# Altium PCB ISL6236_V01_PCB.PcbDoc
Units mm, origin at the board's own origin, x right, y up, seen from the top; angles counter-clockwise.
Board outline 50 x 50 mm, 6 copper layers (L1, L2, L3, L4, L5, L6), stack 0.535 mm thick; 41 components, 27 nets, 119 pads, 69 vias.
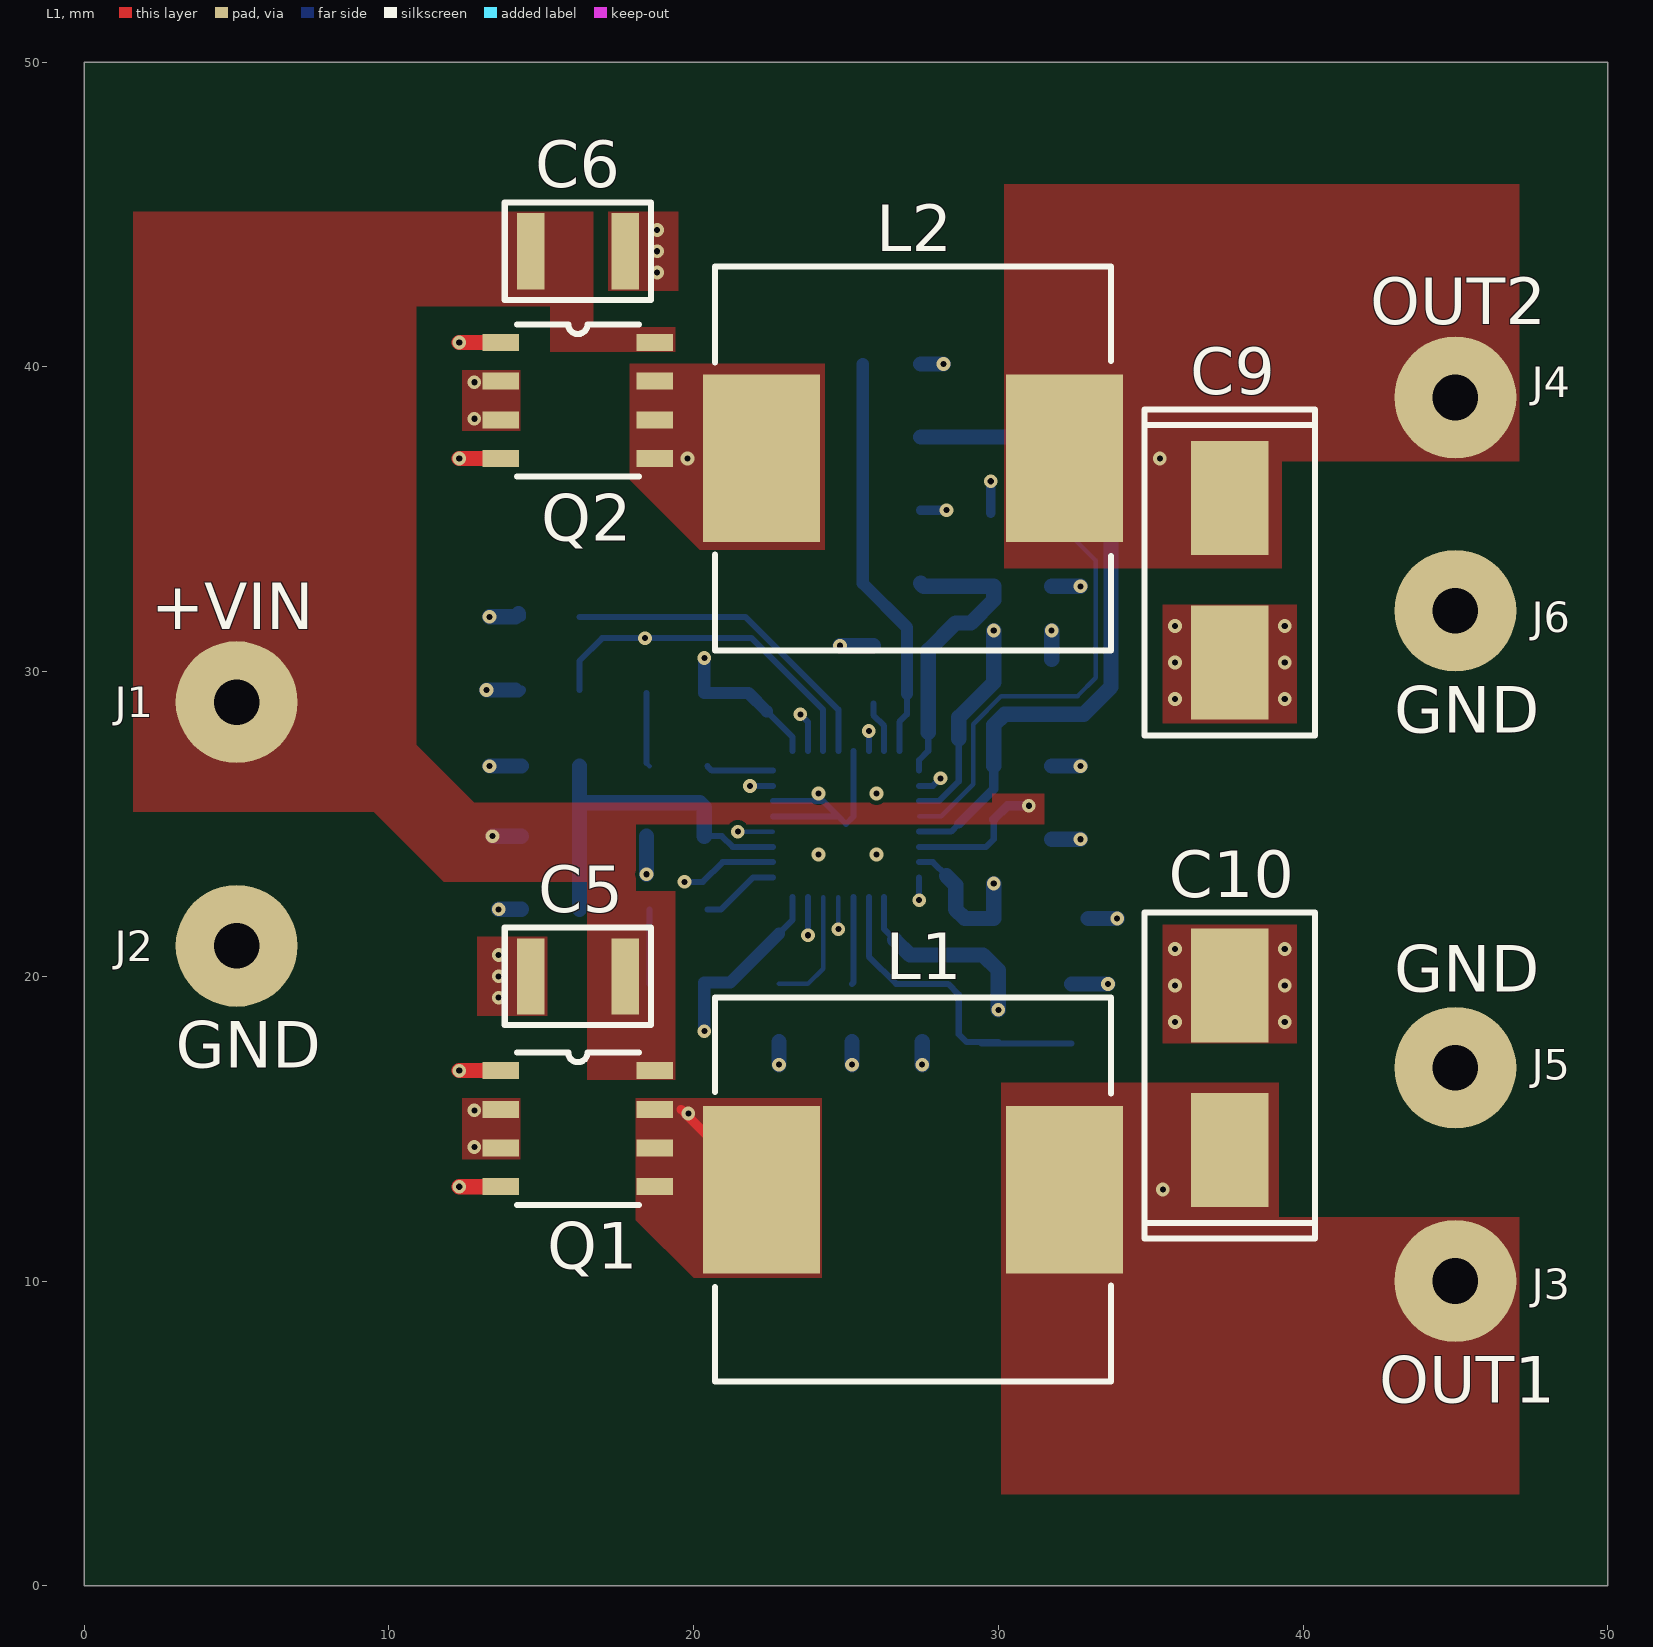
[diagram p0: L1 view]
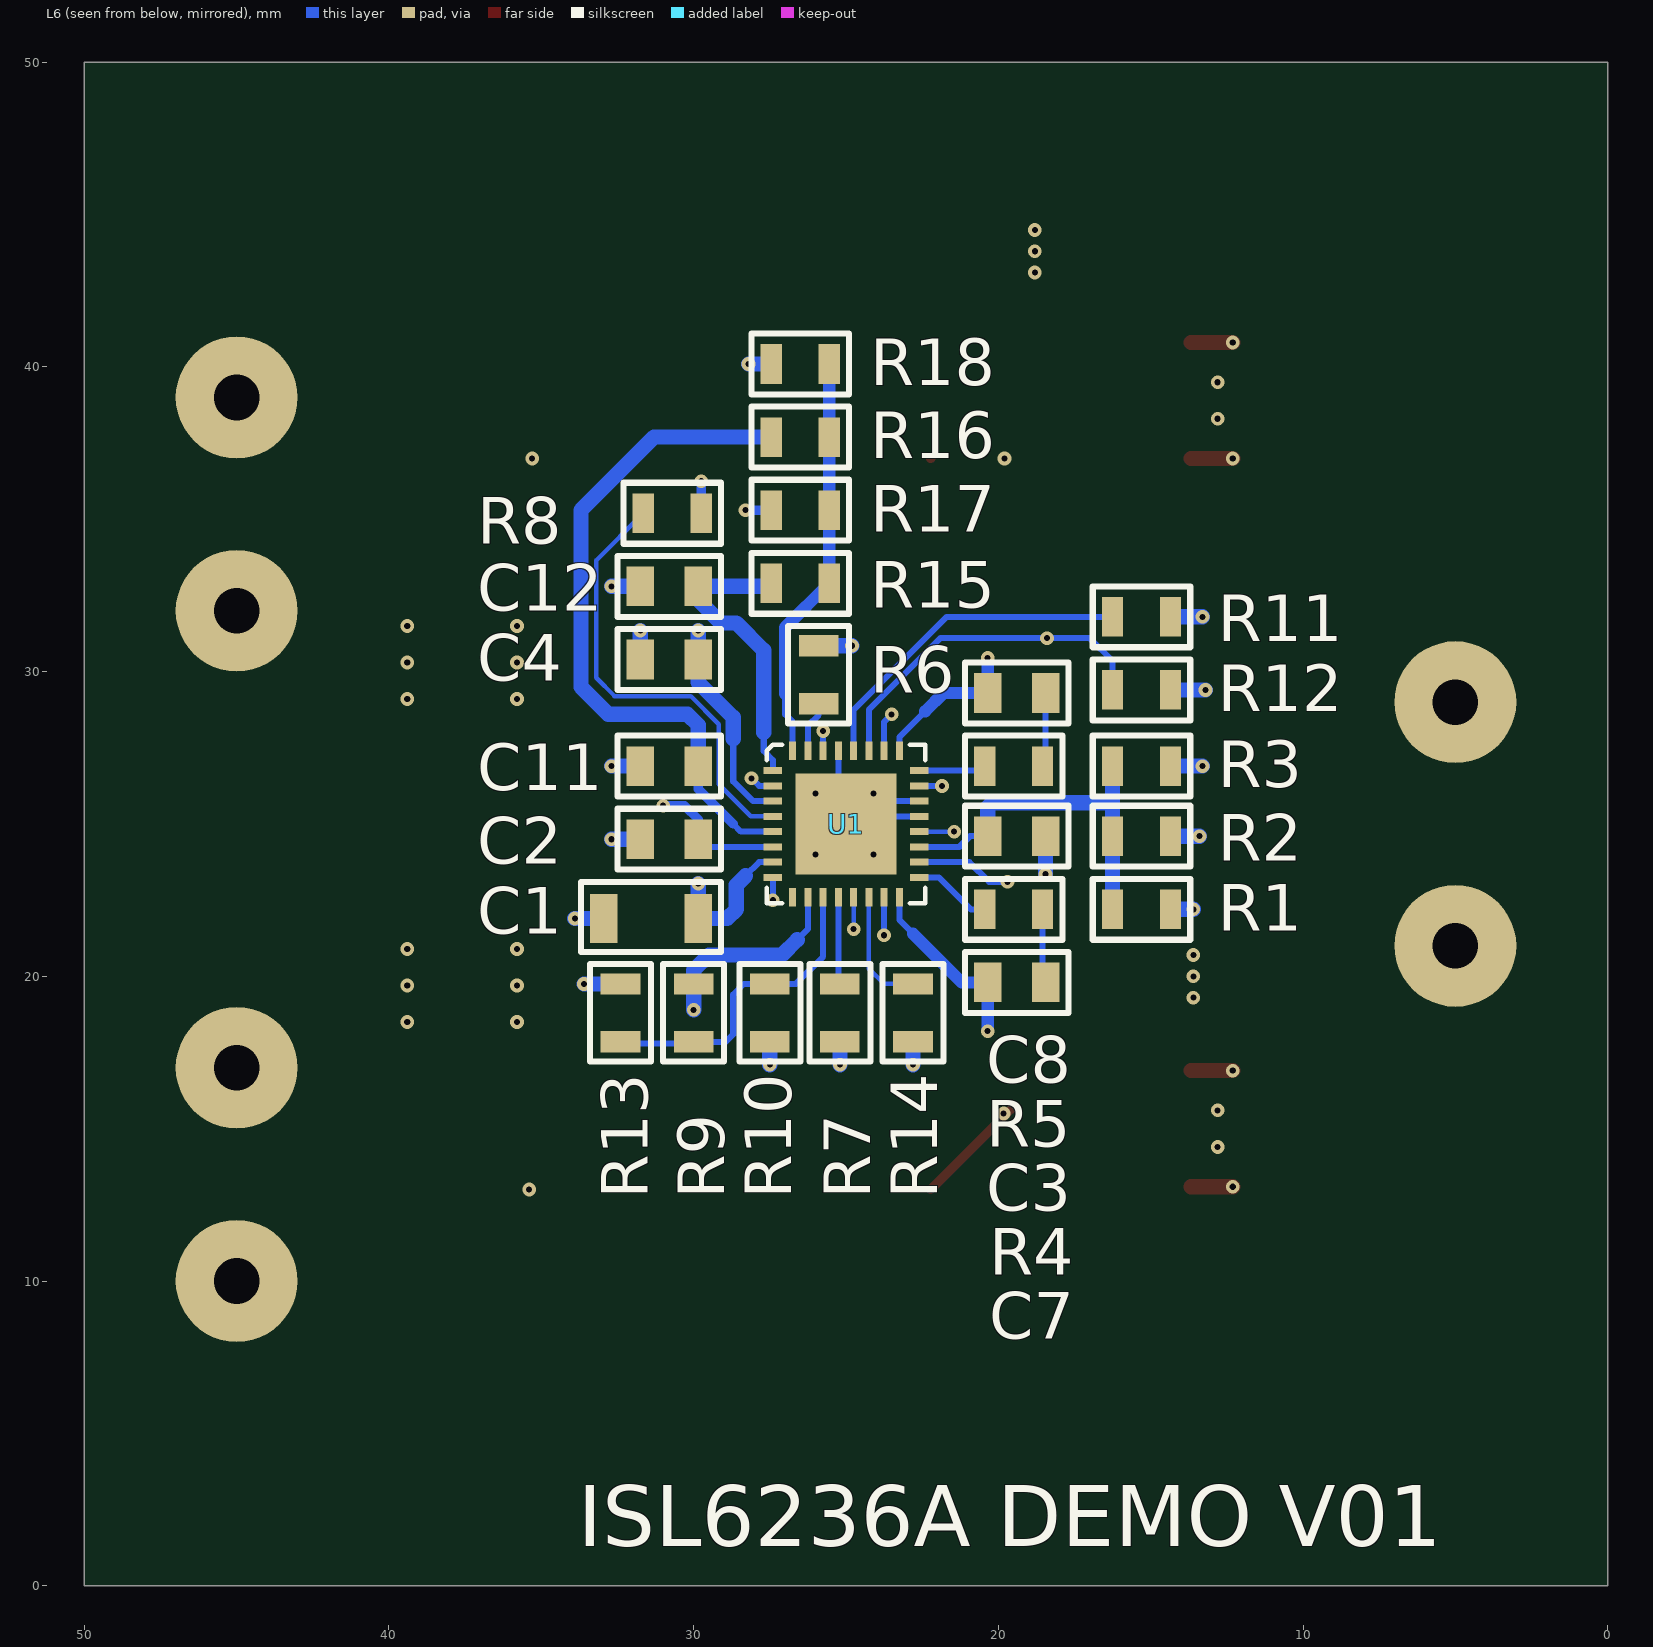
[diagram p1: L6 view, seen from below]
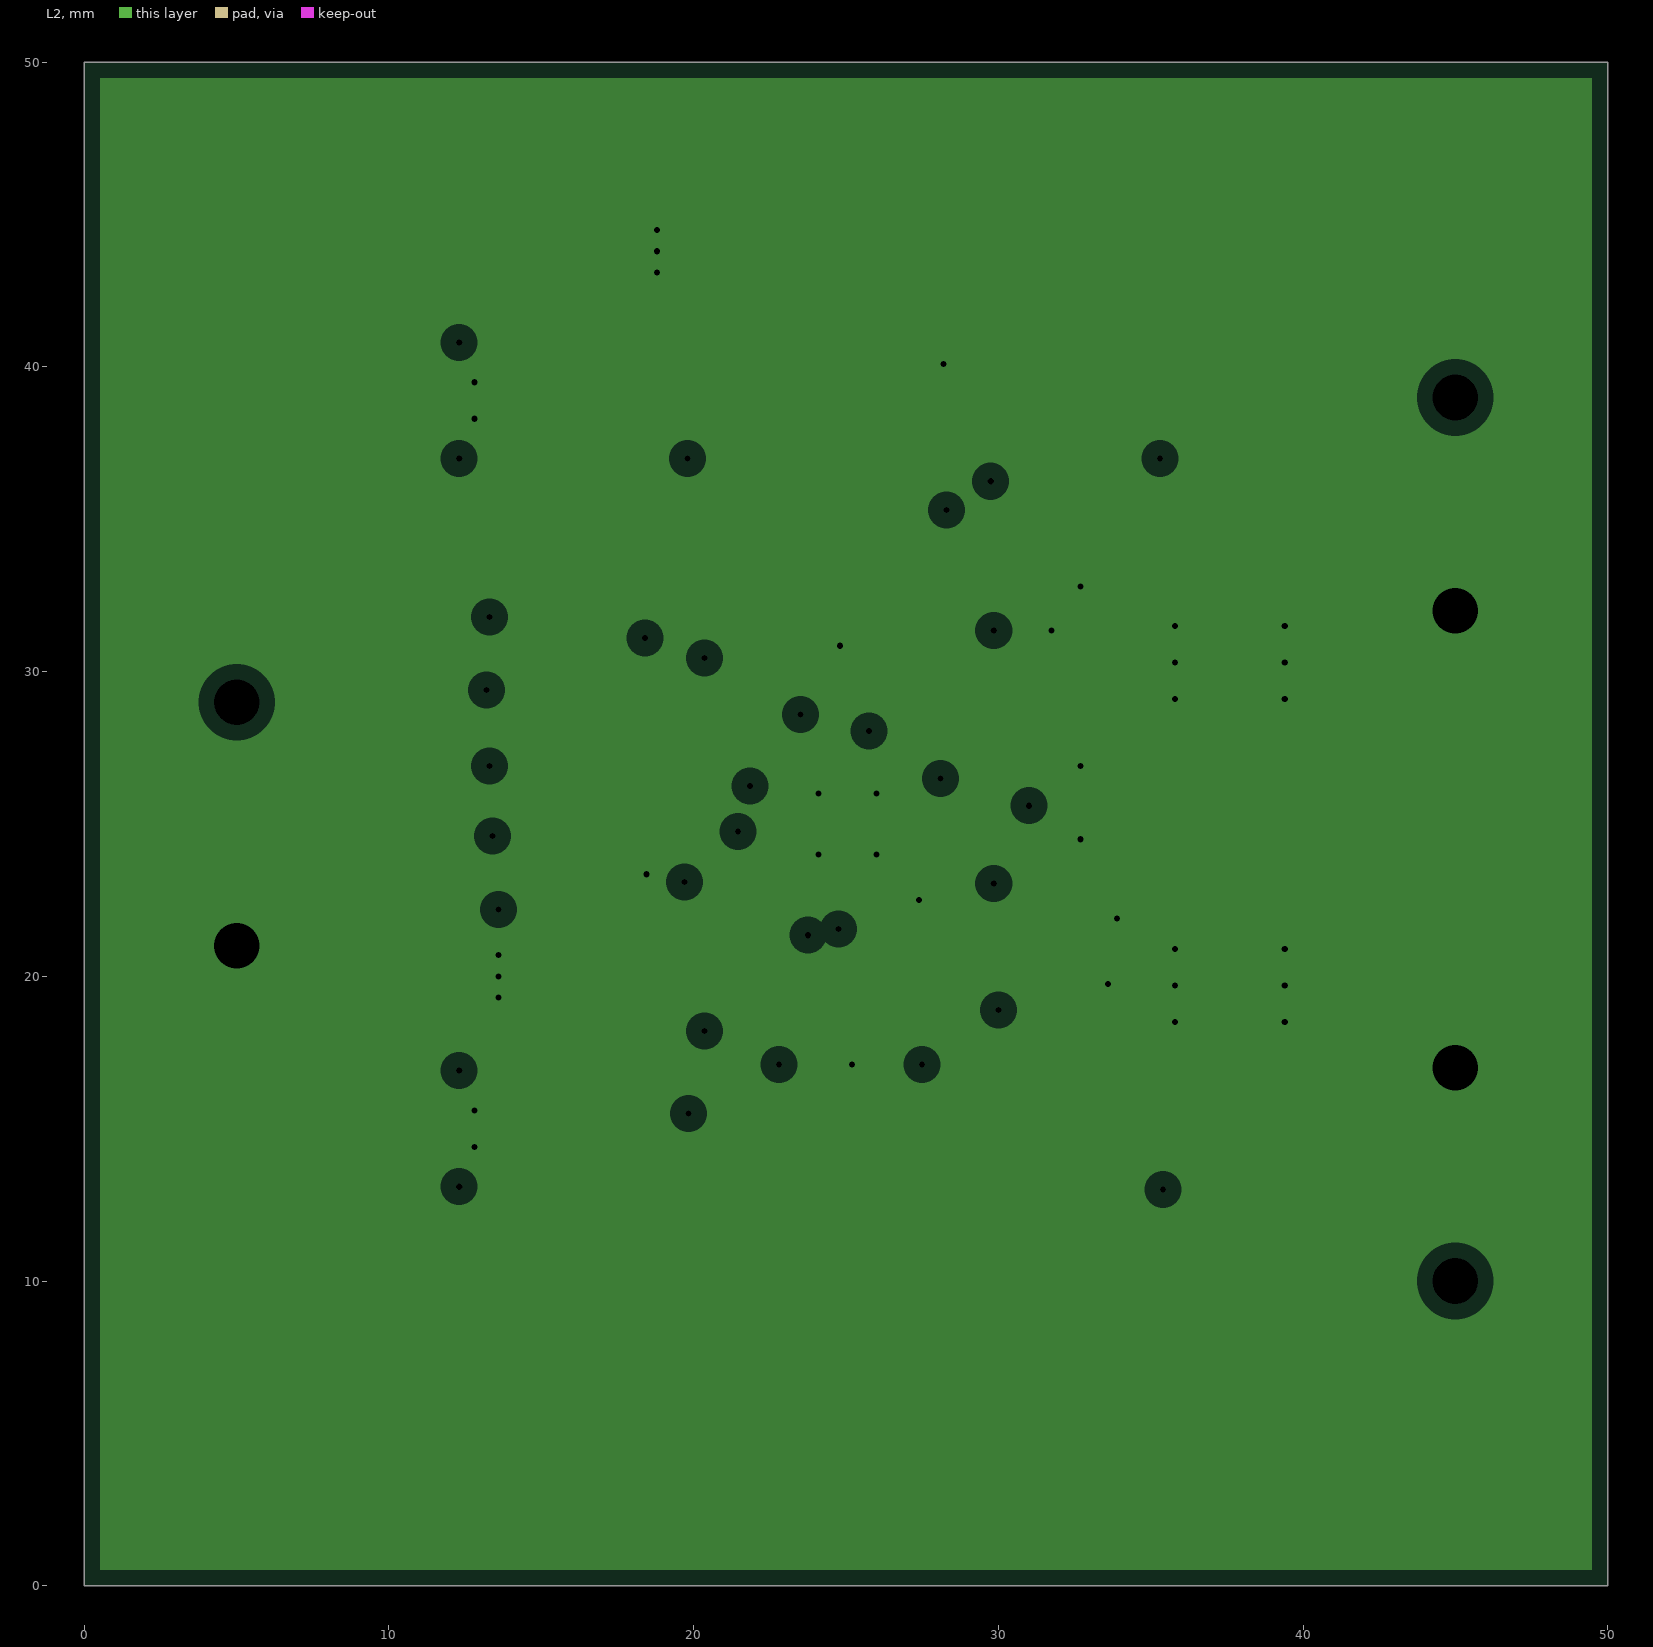
[diagram p2: L2, clearances drawn from the general rule]
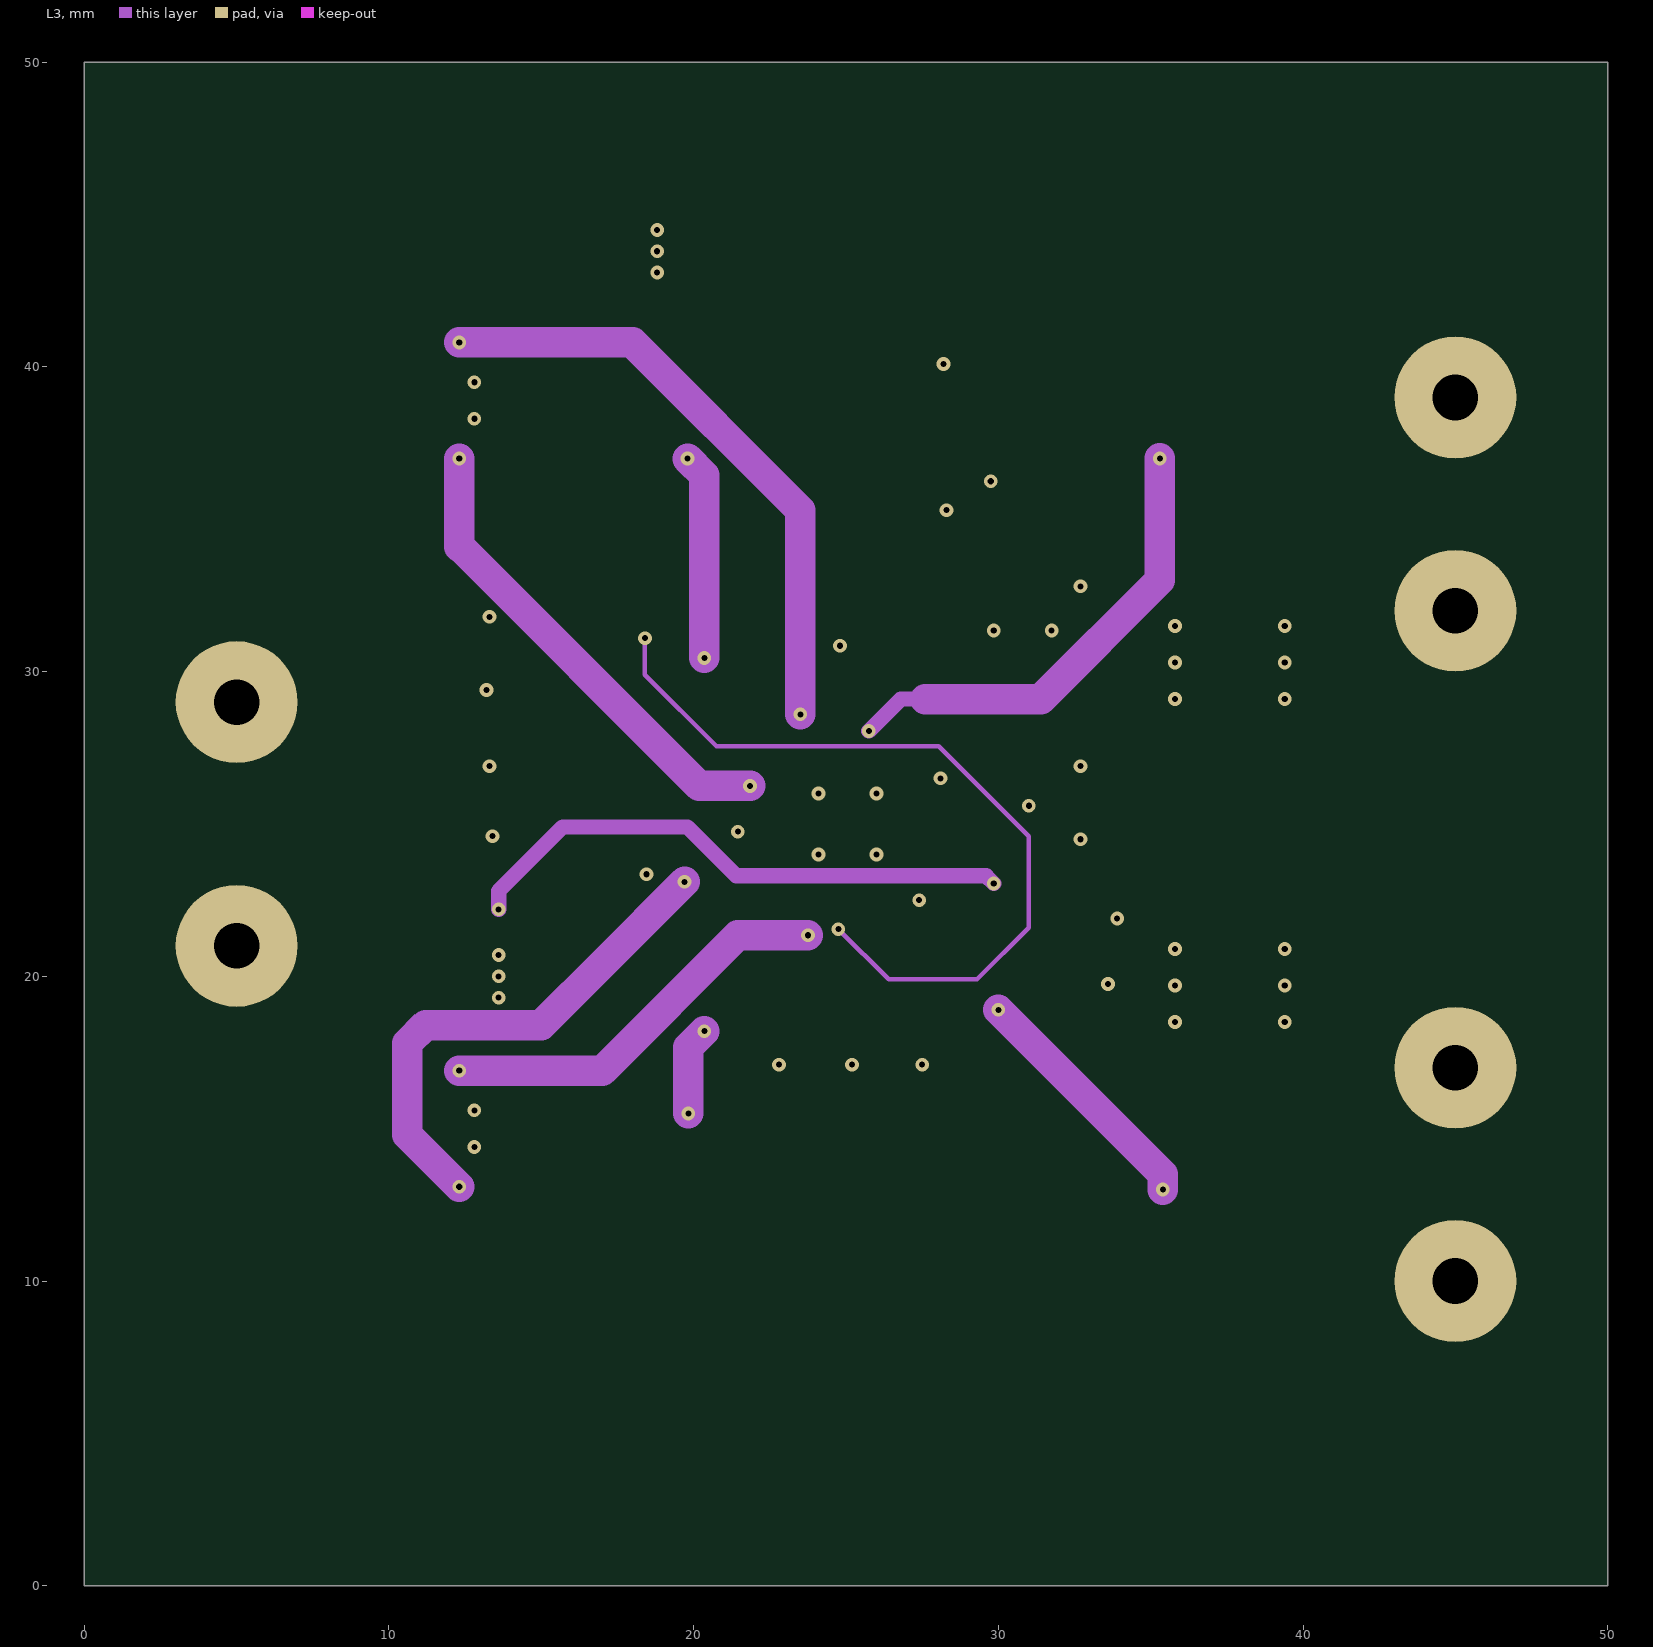
[diagram p3: L3]
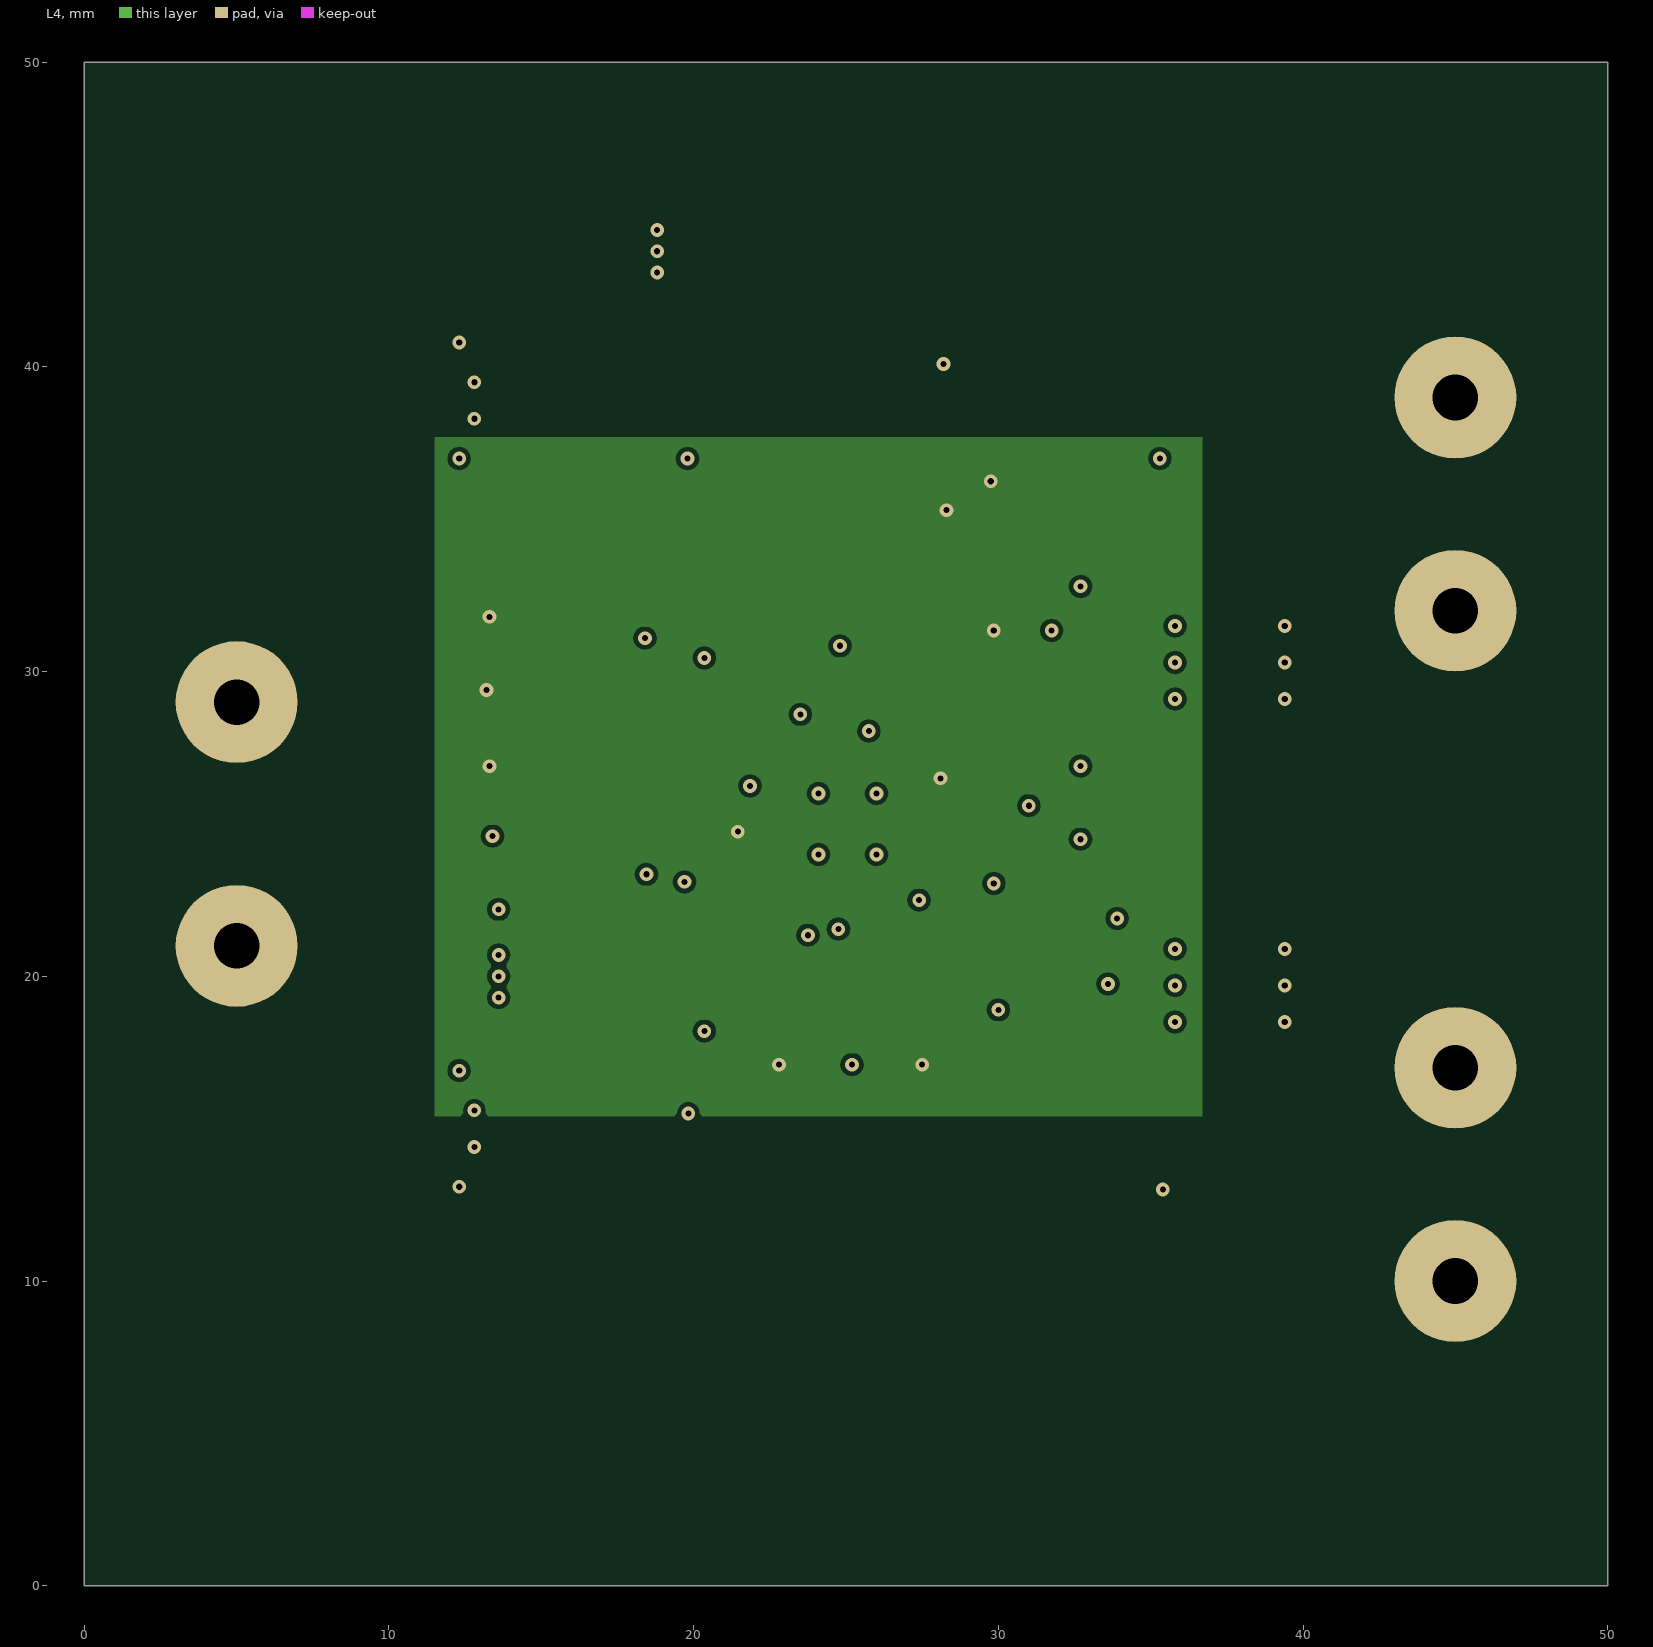
[diagram p4: L4]
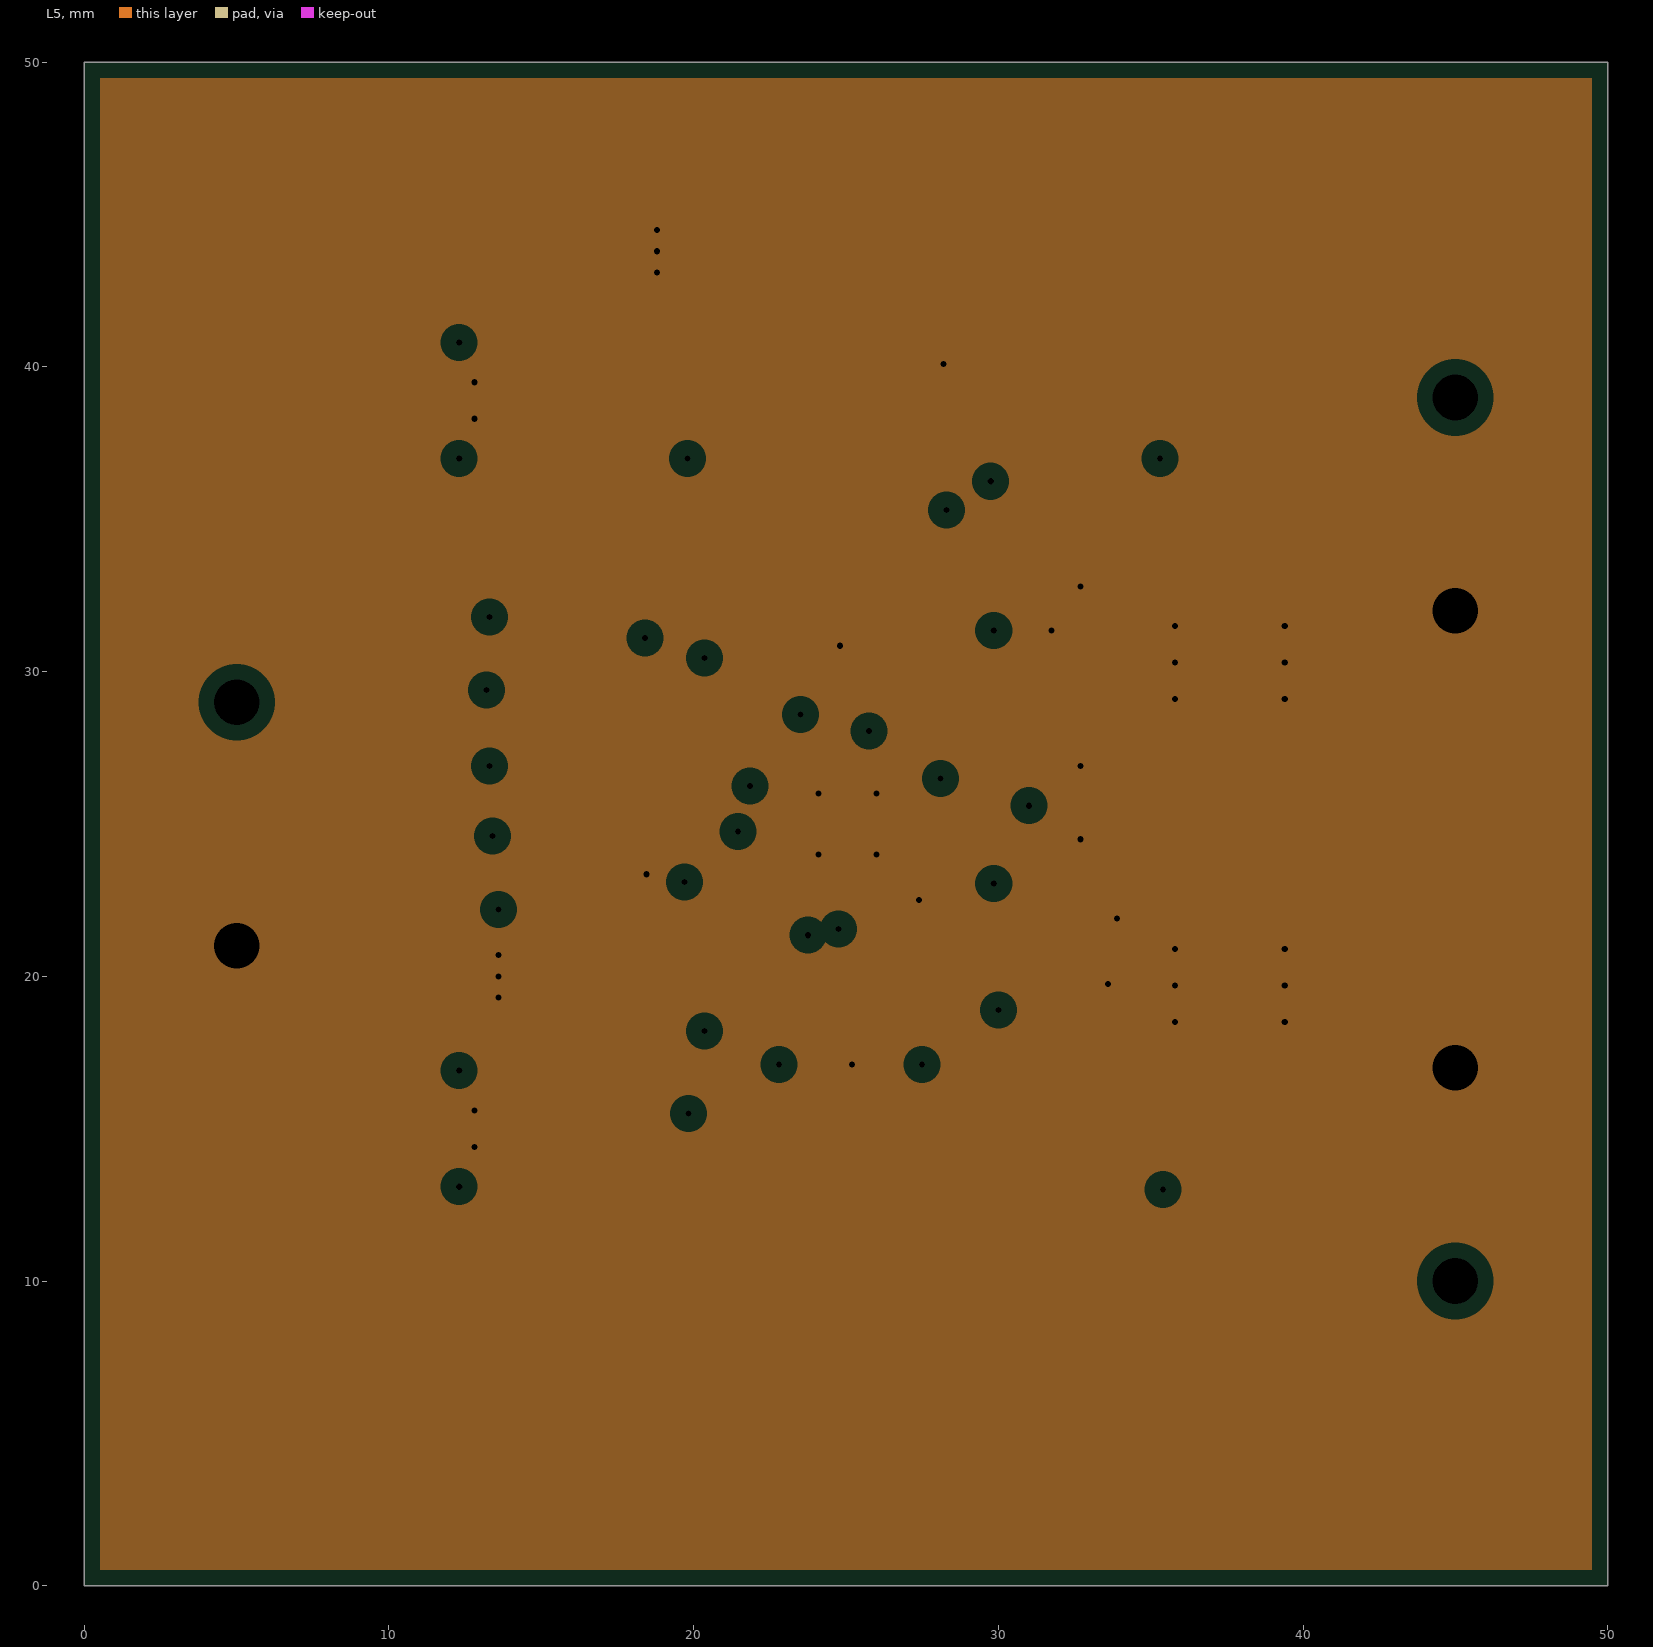
[diagram p5: L5, clearances drawn from the general rule]
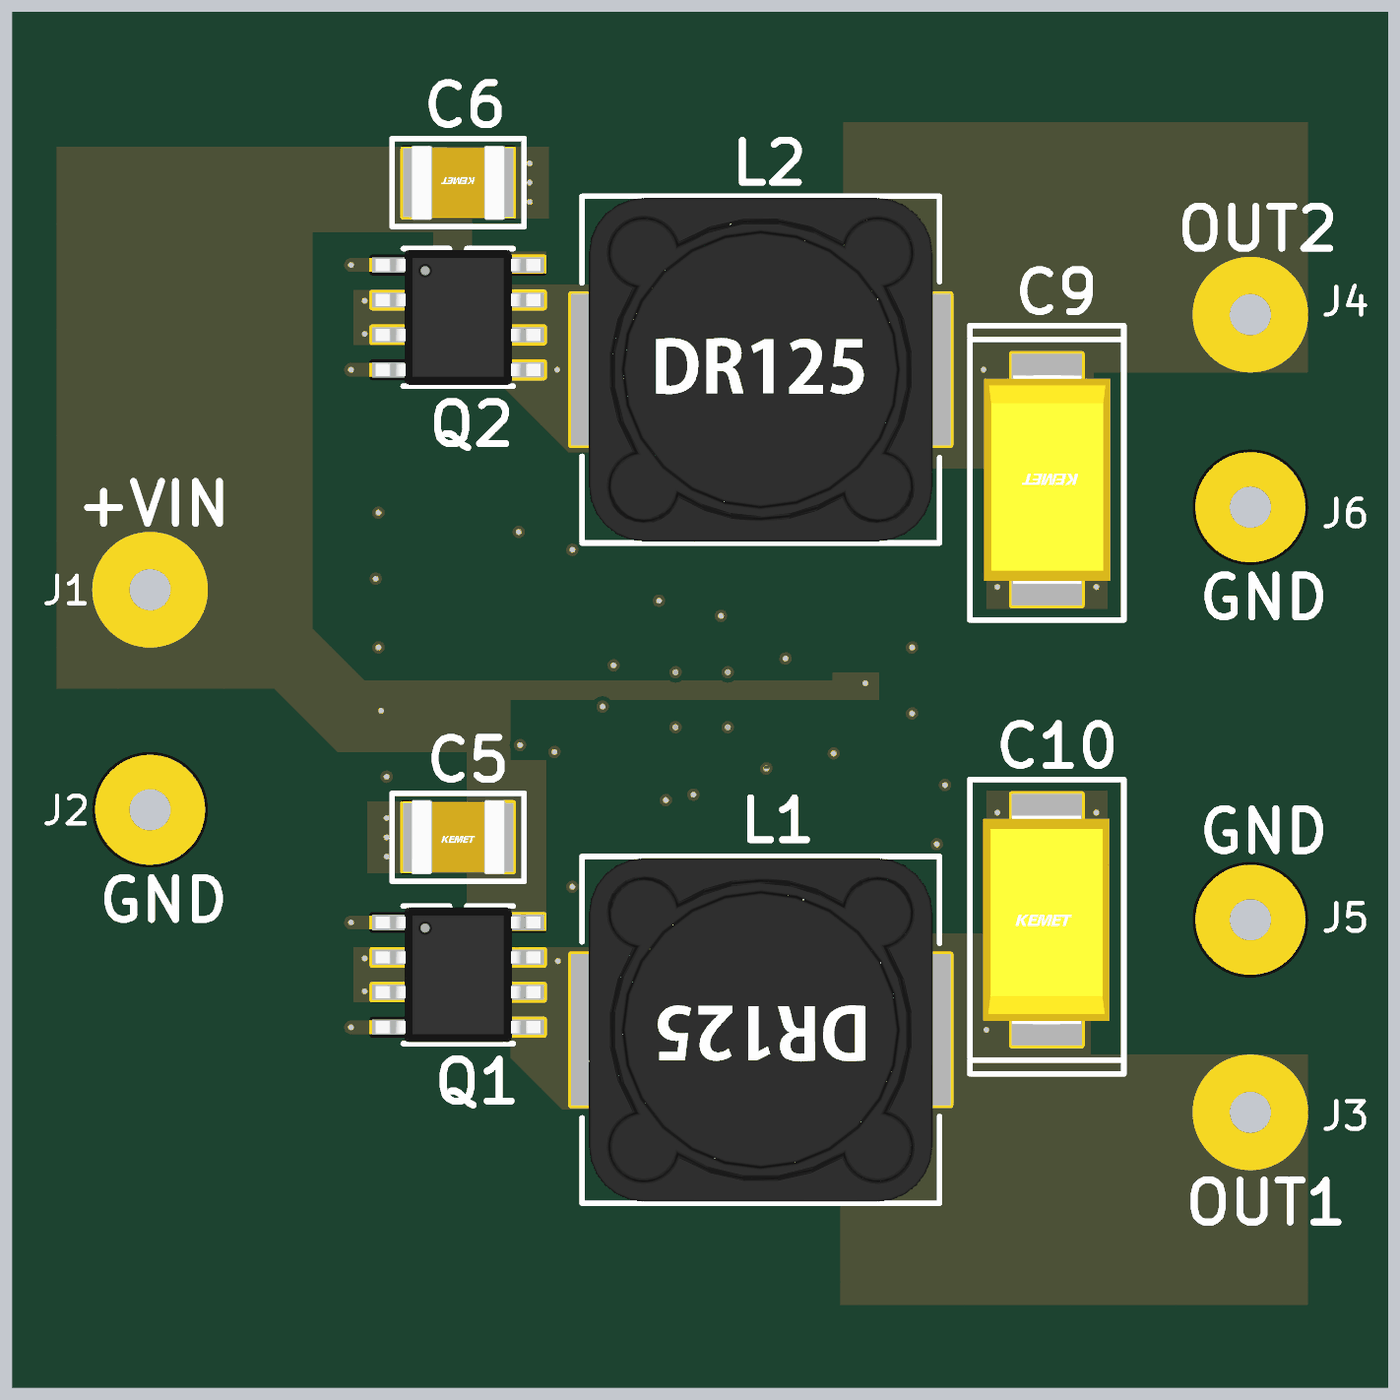
[diagram p6: 3D render of the assembled board from above, using the file's embedded part models]
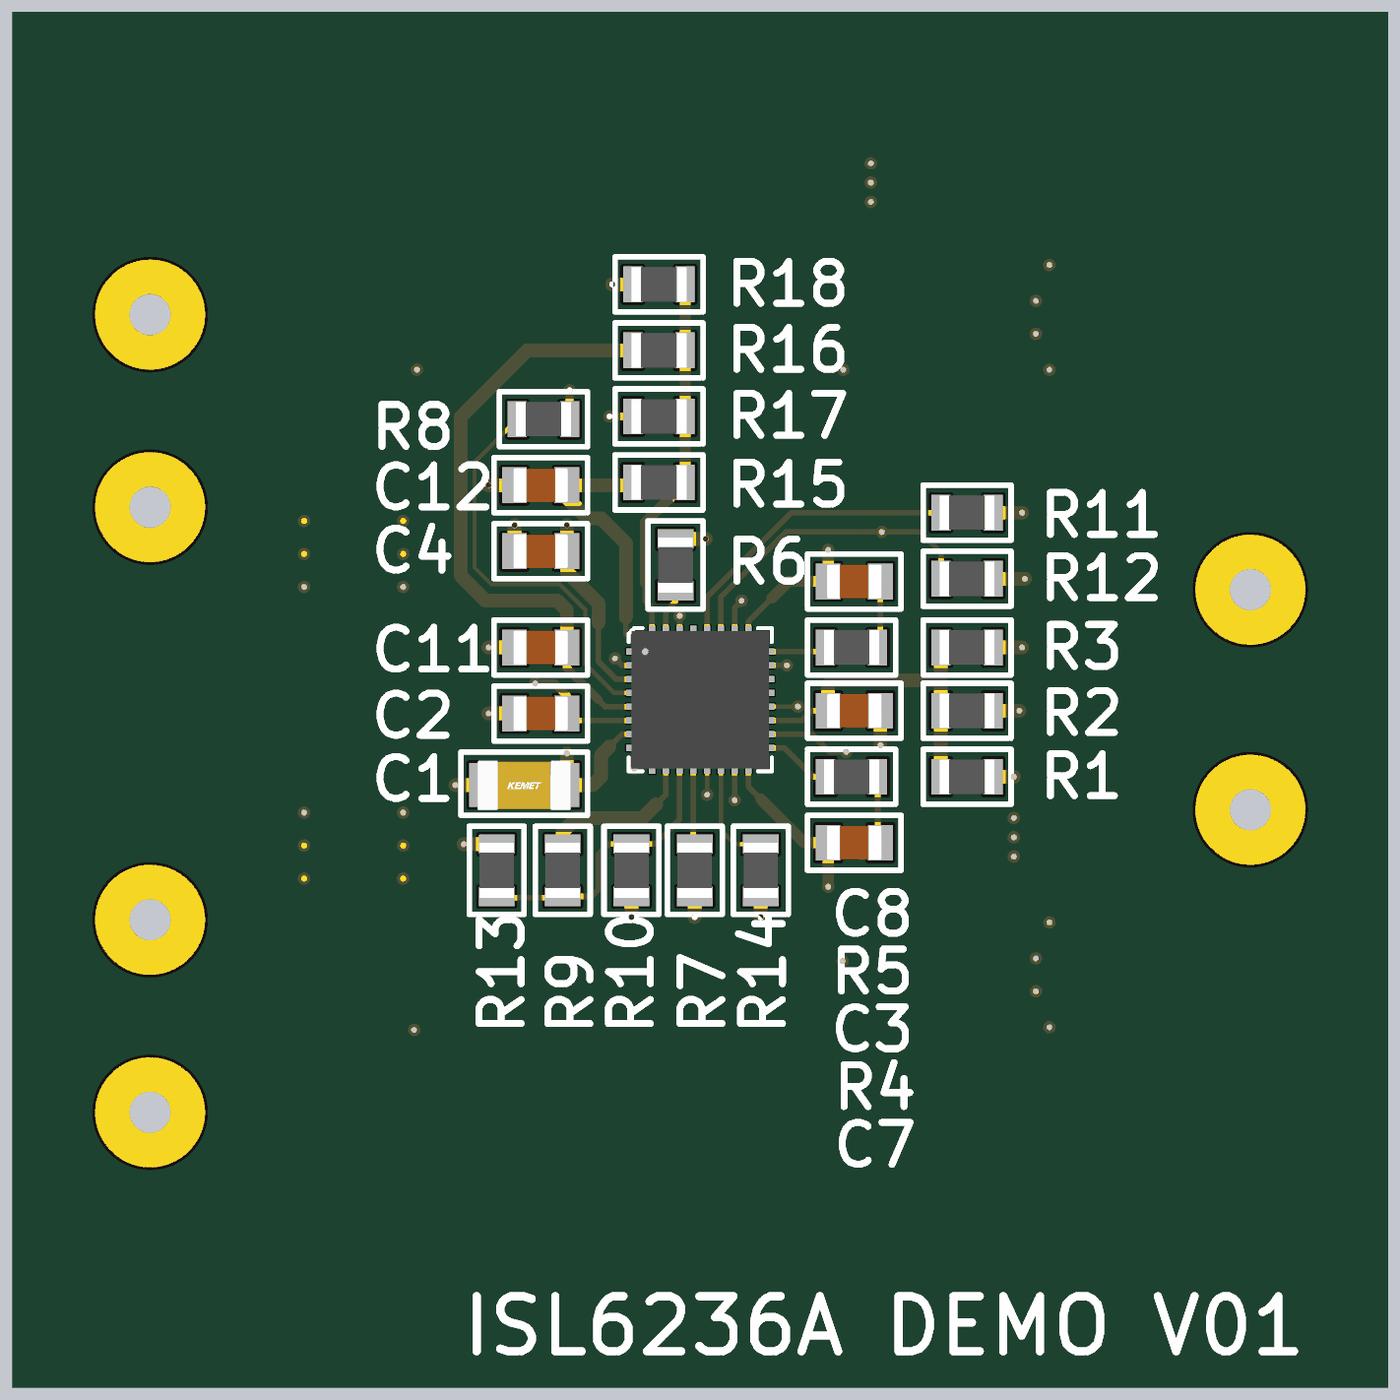
[diagram p7: 3D render of the assembled board from below, using the file's embedded part models]

## Layer stack, top to bottom
Top Solder: solder mask 0.0102, Solder Resist, Dk 3.5
L1: signal copper 0.0356
L2: plane copper 0.036, net GND
L3: signal copper 0.036
L4: signal copper 0.036
L5: plane copper 0.036, net GND
Dielectric 1: dielectric 0.32, FR-4, Dk 4.8
L6: signal copper 0.0356
Bottom Solder: solder mask 0.0102, Solder Resist, Dk 3.5

## Board outline
0,0 50,0 50,50 0,50

## Design rules (kind name [scope] priority, off if disabled: settings)
Clearance [All] p1: gap=0.15 ignorepadtopadclearanceinfootprint=FALSE
ComponentClearance [All] p1: gap=0.1 collisioncheckmode=3 verticalgap=0.1 showdistances=FALSE
HoleSize [All] p1: absolutevalues=TRUE maxlimit=10 minlimit=0.025 maxpercent=80.000 minpercent=20.000
MinimumSolderMaskSliver [All] p1: minsoldermaskwidth=0.1
PlaneClearance [All] p1: clearance=0.508
PlaneConnect PlaneConnect_VIA [All] p1: pad.planeconnectstyle=Relief pad.reliefexpansion=0.508 pad.reliefentries=4 pad.reliefconductorwidth=0.254 pad.reliefairgap=0.254 via.planeconnectstyle=Direct via.reliefexpansion=0.508 via.reliefentries=4 via.reliefconductorwidth=0.254 via.reliefairgap=0.254 // IsVia
PolygonConnect [All] p1: connectstyle=Direct reliefconductorwidth=0.254 reliefentries=4 polygonreliefangle="90 Angle" airgapwidth=0.254
RoutingVias [All] p1: holewidth=0.2 width=0.45 viastyle="Through Hole" minholewidth=0.1 minwidth=0.4 maxholewidth=10 maxwidth=10
SilkToSolderMaskClearance [IsPad] p1: minsilkscreentomaskgap=0.1 clearancetoexposedcopper=TRUE
SolderMaskExpansion [All] p1: expansion=0.102
Width [All] p1: maxlimit=10 minlimit=0.15 preferedwidth=0.15
24 further rules are at their usual default settings.

## Components (designator, comment, footprint, x,y, rotation, side; value= is the part's Value field where it differs from the comment)
C1 "4.7uF, 10V" C1206 31.4,21.9 r180 bottom
C2 "1uF, 50V" C0805 30.8,24.5 r180 bottom
C3 "1uF, 50V" C0805 19.4,24.6 r0 bottom
C4 "1uF, 50V" C0805 30.8,30.4 r180 bottom
C5 "10uF, 50V" C1210 16.2,20 r0 top
C6 "10uF, 50V" C1210 16.2,43.8 r180 top
C7 "100nF, 50V" C0805 19.4,19.8 r0 bottom
C8 "220nF, 50V" C0805 19.4,29.3 r180 bottom
C9 "330uF, 10V" 7343-43 37.6,33 r270 top locked
C10 "330uF, 10V" 7343-43 37.6,17 r90 top locked
C11 "10nF, 50V" C0805 30.8,26.9 r0 bottom
C12 "100nF, 50V" C0805 30.8,32.8 r0 bottom
J1 "4MMx1.5MM" PAD_4MMX1.5MM 5,29 r0 top
J2 "4MMx1.5MM" PAD_4MMX1.5MM 5,21 r0 top
J3 "4MMx1.5MM" PAD_4MMX1.5MM 45,10 r0 top
J4 "4MMx1.5MM" PAD_4MMX1.5MM 45,39 r0 top
J5 "4MMx1.5MM" PAD_4MMX1.5MM 45,17 r0 top
J6 "4MMx1.5MM" PAD_4MMX1.5MM 45,32 r0 top
L1 "3.3uH" DR125 27.2,13 r180 top
L2 "2.2uH" DR125 27.2,37 r0 top
Q1 "SI4816BDY-T1-GE3" SO8 16.2,15 r0 top
Q2 "SI4816BDY-T1-GE3" SO8 16.2,38.9 r0 top
R1 "0R" R0805 15.3,22.2 r180 bottom
R2 "0R" R0805 15.3,24.6 r0 bottom
R3 "10R" R0805 15.3,26.9 r180 bottom
R4 "1R" R0805 19.5,22.2 r0 bottom
R5 "1R" R0805 19.5,26.9 r180 bottom
R6 "200K" R0805 25.9,29.9 r90 bottom
R7 "200K" R0805 25.2,18.8 r90 bottom
R8 "10K" R0805 30.7,35.2 r180 bottom
R9 "DNF" R0805 30,18.8 r90 bottom
R10 "0R" R0805 27.5,18.8 r270 bottom
R11 "200K" R0805 15.3,31.8 r180 bottom
R12 "200K" R0805 15.3,29.4 r0 bottom
R13 "DNF" R0805 32.4,18.8 r270 bottom
R14 "10K" R0805 22.8,18.8 r270 bottom
R15 "DNF" R0805 26.5,32.9 r0 bottom
R16 "0R" R0805 26.5,37.7 r0 bottom
R17 "DNF" R0805 26.5,35.3 r0 bottom
R18 "DNF" R0805 26.5,40.1 r180 bottom
U1 "ISL6236AIRZ" ISL6236_LQFN32 25,25 r180 bottom locked

## Footprints (in the part's own frame and the unit in brackets; to place one, negate y for a bottom-side part, rotate by r counter-clockwise, add the part's x,y. Pads: shape width x height; smd on the part's side, far side on the other; paste and mask are expansions set on the pad)
7343-43 [mm]
  rect 3.75x2.55 smd: 1(-2.7,0) 2(2.7,0)
  silkscreen extent -5.6,-2.8 5.1,2.8, body extent -3.8,-2.29 3.8,2.31, height 4.32
C0805 [mm]
  rect 0.9x1.3 smd: 1(-0.95,0) 2(0.95,0)
  silkscreen extent -1.7,-1 1.7,1, body extent -1,-0.62 1,0.63, height 1
C1206 [mm]
  rect 0.9x1.6 smd: 1(-1.55,0) 2(1.55,0)
  silkscreen extent -2.3,-1.1 2.3,1.2, body extent -1.7,-0.91 1.7,0.89, height 1.78
C1210 [mm]
  rect 0.9x2.5 smd: 1(-1.55,0) 2(1.55,0)
  silkscreen extent -2.4,-1.6 2.4,1.6, body extent -1.7,-1.35 1.7,1.35, height 2.76
DR125 [mm]
  rect 3.85x5.5 smd: 1(-4.975,0) 2(4.975,0)
  silkscreen extent -6.5,-6.3 6.5,6.3, body extent -6.25,-6.25 6.25,6.25, height 5.81
ISL6236_LQFN32 [mm]
  rect 0.6x0.23 smd mask+0.05: 1(-2.4,1.75) 2(-2.4,1.25) 3(-2.4,0.75) 4(-2.4,0.25) 5(-2.4,-0.25) 6(-2.4,-0.75) 7(-2.4,-1.25) 8(-2.4,-1.75) 17(2.4,-1.75) 18(2.4,-1.25) 19(2.4,-0.75) 20(2.4,-0.25) 21(2.4,0.25) 22(2.4,0.75) 23(2.4,1.25) 24(2.4,1.75)
  rect 0.23x0.6 smd mask+0.05: 9(-1.75,-2.4) 10(-1.25,-2.4) 11(-0.75,-2.4) 12(-0.25,-2.4) 13(0.25,-2.4) 14(0.75,-2.4) 15(1.25,-2.4) 16(1.75,-2.4) 25(1.75,2.4) 26(1.25,2.4) 27(0.75,2.4) 28(0.25,2.4) 29(-0.25,2.4) 30(-0.75,2.4) 31(-1.25,2.4) 32(-1.75,2.4)
  rect 3.3x3.3 smd mask+0.05: 33(0,0)
  silkscreen extent -2.6,-2.6 2.6,2.6, body extent -2.5,-2.5 2.5,2.5, height 0.99
PAD_4MMX1.5MM [mm]
  round 4 hole 1.5: 1(0,0)
R0805 [mm]
  rect 0.7x1.3 smd: 1(-0.95,0) 2(0.95,0)
  silkscreen extent -1.6,-1 1.6,1, body extent -1,-0.62 1,0.63, height 0.58
SO8 [mm]
  rect 1.195x0.56 smd: 1(-2.527,1.905) 2(-2.527,0.635) 3(-2.527,-0.635) 4(-2.527,-1.905) 5(2.528,-1.905) 6(2.528,-0.635) 7(2.528,0.635) 8(2.528,1.905)
  silkscreen extent -2,-2.5 2,2.5, body extent -3,-2.45 3,2.45, height 1.7

## Part data
C1: library part C1206C475K8PACTU, "KEMET         C1206C475K8PACTU             SMD Multilayer Ceramic Capacitor, 1206 [3216 Metric], 4.7 F, 10 V,  10%, X5R, C Series", Capacitance="4.7 µF", Case Size="1206 (3216 mm)", Dielectric Characteristic=X5R, Manufacturer=KEMET, Supplier Part Number 1=80-C1206C475K8P, Tolerance="-10, +10 %", Voltage, Rating="10 VDC", Brand/Series="C Series", ComponentLink1Description=http://www.alliedelec.com/m/d/9bfe7773041ffe9d406e68bc7b377fdd.pdf?src-supplier=Allied+Electronics, ComponentLink1URL=http://www.alliedelec.com/m/d/9bfe7773041ffe9d406e68bc7b377fdd.pdf?src-supplier=Allied+Electronics, ComponentLink2Description=http://www.jameco.com/Jameco/Products/ProdDS/1568870.pdf?src-supplier=Jameco, ComponentLink2URL=http://www.jameco.com/Jameco/Products/ProdDS/1568870.pdf?src-supplier=Jameco, Dimensions="0.126\" x 0.063\" (3.2 x 1.6mm) LxW", Manufacturer Part Number=C1206C475K8PACTU, Material, Element=Ceramic, Mounting Type=PCB, Packaging="Cut Tape", Pricing 1="1=0.48, 10=0.304, 100=0.192, 500=0.162, 1000=0.144, 2000=0.114 (USD)", Series="C1206 Series", Special Features="High CV", Stock 1=3191, Supplier 1=Mouser, Termination=SMD
C2 C3 C4: library part 08055C105KAZ4A, Manufacturer="Kyocera AVX", Supplier Part Number 1=581-08055C105KAZ4A, Manufacturer Part Number=08055C105KAZ4A, Pricing 1="1=0.38, 10=0.264, 100=0.159, 500=0.119, 1000=0.1, 2500=0.085 (USD)", Stock 1=7924, Supplier 1=Mouser
C5 C6: library part C1210C106K5PACTU, "KEMET - C1210C106K5PACTU - SMD Multilayer Ceramic Capacitor, 10 µF, 50 V, 1210 [3225 Metric], ± 10%, X5R, C Series KEMET", Capacitance=10µF, Manufacturer=KEMET, Operating Temperature="-55°C ~ 85°C", Package / Case="1210 (3225 Metric)", Ratings=-, Standard Package=1, Supplier Part Number 1=80-C1210C106K5P, Temperature Coefficient=X5R, Tolerance=±10%, Voltage - Rated=50V, Applications="General Purpose", Category=Capacitors, ComponentLink1Description=https://api.kemet.com/component-edge/download/datasheet/C1210C106K5PACTU.pdf?src-supplier=Digi-Key, ComponentLink1URL=https://api.kemet.com/component-edge/download/datasheet/C1210C106K5PACTU.pdf?src-supplier=Digi-Key, Dynamic Catalog="X5R Dielectric (Commercial Grade)", Family="Ceramic Capacitors", Features=-, Height - Seated (Max)=-, Lead Spacing=-, Lead Style=-, Manufacturer Part Number=C1210C106K5PACTU, Mounting Type="Surface Mount, MLCC", Other Names=399-11402-6, Packaging=Digi-Reel®, Pricing 1="1=1.29, 10=0.986, 100=0.705, 500=0.546, 1000=0.382, 2000=0.363, 10000=0.349, 25000=0.28 (USD)", Product Training Modules="Capacitor Basics- Typical Uses for Capacitors", Series=-, Size / Dimension="0.126\" L x 0.098\" W (3.20mm x 2.50mm)", Stock 1=17950, Supplier 1=Mouser
C7 C12: library part C0805C104K5RAC7411, "Cap Ceramic 0.1uF 50V X7R 10% SMD 0805 125C Paper T/R", Capacitance Value="0.1 uF", Dielectric=X7R, Manufacturer=KEMET, Operating Temperature="-55 to 125 °C", Package/Case=0805, Supplier Part Number 1=80-C0805C104K5RACLR, Tolerance="10 %", Voltage="50 Vdc", Category="Capacitor Ceramic Multilayer", ComponentLink1Description=https://www.verical.com/server-webapp/html/getDatasheet?partID=248513&src-supplier=Verical, ComponentLink1URL=https://www.verical.com/server-webapp/html/getDatasheet?partID=248513&src-supplier=Verical, ComponentLink2Description=http://components.arrow.com/part/dataview/30748302S8994022N7429?src-supplier=Arrow, ComponentLink2URL=http://components.arrow.com/part/dataview/30748302S8994022N7429?src-supplier=Arrow, ComponentLink3Description=http://components.arrow.com/part/dataview/0323_00325482?src-supplier=Arrow+Europe, ComponentLink3URL=http://components.arrow.com/part/dataview/0323_00325482?src-supplier=Arrow+Europe, Construction=Flat, Manufacturer Part Number=C0805C104K5RAC7411, Mounting="Surface Mount", Packaging="Tape & Reel", Pricing 1="1=0.1, 10=0.049, 100=0.032, 500=0.03, 1000=0.025, 2000=0.021 (USD)", Product Depth="1.25 mm", Product Height="0.9 mm", Product Length="2 mm", Rad Hard=No, Stock 1=57173, Supplier 1=Mouser
C8: library part C0805F224K5RACAUTO, "Cap Ceramic 0.22uF 50V X7R 10% SMD 0805 125°C Embossed Plastic T/R", Capacitance=.22uF, Case Style="Ceramic Chip", Manufacturer=KEMET, Operating Temp Range="-55C to 125C", Package / Case=0805, Supplier Part Number 1=80-C0805F224K5RAUTO, Temp Coeff (Dielectric)=X7R, Tolerance (+ or -)=10%, Voltage=50VDC, ComponentLink1Description=http://components.arrow.com/part/dataview/0323_04088687?src-supplier=Arrow+Europe, ComponentLink1URL=http://components.arrow.com/part/dataview/0323_04088687?src-supplier=Arrow+Europe, ComponentLink2Description=https://api.kemet.com/component-edge/download/datasheet/C0805F224K5RACAUTO.pdf?src-supplier=Digi-Key, ComponentLink2URL=https://api.kemet.com/component-edge/download/datasheet/C0805F224K5RACAUTO.pdf?src-supplier=Digi-Key, Construction="SMT Chip", Failure Rate="Not Required", Manufacturer Part Number=C0805F224K5RACAUTO, Mounting Style="Surface Mount", Packaging="Tape and Reel", Pricing 1="1=0.57, 10=0.363, 100=0.219, 500=0.198, 1000=0.168, 2500=0.13 (USD)", Product Depth (mm)=1.25mm, Product Diameter (mm)="Not Requiredmm", Product Height (mm)=1.25mm, Product Length (mm)=2mm, Stock 1=3880, Supplier 1=Mouser, Wire Form="Not Required"
C9 C10: library part T530X337M010ATE004, "Tantalum Capacitors - Polymer SMD 330uF 10volts 20%", Capacitance="330 uF", Case Code - in=2917, Case Code - mm=7343, Case Length="7.3 mm", Case Width="4.3 mm", Leakage Current="330 uA", Manufacturer=KEMET, Mfr Case Code="X Case", Operating Temperature Range="- 55 C to + 125 C", Package / Case="2917 (7343 metric)", Ripple Current="8.2 A", Supplier Part Number 1=80-T530X337M010ATE4, Tolerance="20 %", Voltage Rating="10 V", Brand=Kemet, ComponentLink1Description=https://www.alliedelec.com/m/d/c2b5846d1b4015924ec44504ba06510b.pdf?src-supplier=Allied+Electronics, ComponentLink1URL=https://www.alliedelec.com/m/d/c2b5846d1b4015924ec44504ba06510b.pdf?src-supplier=Allied+Electronics, ComponentLink2Description=http://uk.rs-online.com/webdocs/1529/0900766b815291cb.pdf?src-supplier=RSComponents, ComponentLink2URL=http://uk.rs-online.com/webdocs/1529/0900766b815291cb.pdf?src-supplier=RSComponents, Dimensions="4.3 mm W x 7.3 mm L", Dissipation Factor DF=8, ESR="4 mOhms", Factory Pack Quantity=500, Height="4.3 mm", Manufacturer Part Number=T530X337M010ATE004, Packaging=Reel, Pricing 1="1=6.86, 10=6.09, 100=4.87, 250=4.87, 500=3.68, 1000=3.37 (USD)", Product="Tantalum Organic Polymer Standard Grade", Product Category="Tantalum Capacitors - Polymer SMD", RoHS=Details, Series=T530, Stock 1=5172, Supplier 1=Mouser, Termination Style=SMD/SMT, Tradename=KO-CAP, Type="Conductive Polymer Chip Capacitors Low ESR", Voltage Rating DC="10 V"
C11: library part C0805X103K5RAC7210, "Cap, 0.01?F, 50V, 10%, X7R, 0805", Manufacturer=KEMET, Supplier Part Number 1=80-C0805X103K5R7210, Manufacturer Part Number=C0805X103K5RAC7210, Pricing 1="1=0.34, 10=0.203, 100=0.122, 500=0.111, 1000=0.1, 2000=0.083 (USD)", Stock 1=13697, Supplier 1=Mouser
J1 J2 J3 J4 J5 J6: library part PAD_4MMx1.5MM, "4MMx1.5MM pad"
L1: library part DR125-3R3-R, "FIXED IND 3.3UH 9.26A 6.3 MOHM", Current - Saturation=12.7A, Current Rating=9.26A, DC Resistance (DCR)="6.3 mOhm", Frequency - Self Resonant=-, Frequency - Test=100kHz, Inductance=3.3µH, Manufacturer="Eaton Cooper", Operating Temperature="-40°C ~ 125°C", Package / Case=Nonstandard, Supplier Part Number 1=704-DR125-3R3-R, Tolerance=±20%, Category="Inductors, Coils, Chokes", ComponentLink1Description=https://www.verical.com/server-webapp/html/getDatasheet?partID=251124&src-supplier=Verical, ComponentLink1URL=https://www.verical.com/server-webapp/html/getDatasheet?partID=251124&src-supplier=Verical, ComponentLink2Description=http://www.farnell.com/datasheets/87246.pdf?src-supplier=Farnell, ComponentLink2URL=http://www.farnell.com/datasheets/87246.pdf?src-supplier=Farnell, ComponentLink3Description=http://www.cooperindustries.com/content/dam/public/bussmann/Electronics/Resources/product-datasheets/Bus_Elx_DS_4315_DR_Series.pdf?src-supplier=Future+Electronics, ComponentLink3URL=http://www.cooperindustries.com/content/dam/public/bussmann/Electronics/Resources/product-datasheets/Bus_Elx_DS_4315_DR_Series.pdf?src-supplier=Future+Electronics, ComponentLink4Description=http://www.onlinecomponents.com/productFiles/mf-COI/4a32919a-7470-4ae0-be45-b59e3a1351ef.pdf?src-supplier=Onlinecomponents.com, ComponentLink4URL=http://www.onlinecomponents.com/productFiles/mf-COI/4a32919a-7470-4ae0-be45-b59e3a1351ef.pdf?src-supplier=Onlinecomponents.com, Family="Fixed Inductors", Height - Seated (Max)="0.236\" (6.00mm)", Manufacturer Part Number=DR125-3R3-R, Material - Core=Ferrite, Mounting Type="Surface Mount", Packaging=Digi-Reel®, Pricing 1="1=2.03, 10=1.88, 100=1.32, 600=0.901, 1200=0.862, 2400=0.842, 4800=0.822, 9600=0.795, 24600=0.769 (USD)", Q @ Freq=-, Ratings=-, Series=DR, Shielding=Shielded, Size / Dimension="0.492\" L x 0.492\" W (12.50mm x 12.50mm)", Stock 1=368, Supplier 1=Mouser, Type=Wirewound
L2: library part DR125-2R2-R, "FIXED IND 2.2UH 10.9A 4.5 MOHM", Current - Saturation=15A, Current Rating=10.9A, DC Resistance (DCR)="4.5 mOhm", Frequency - Self Resonant=-, Frequency - Test=100kHz, Inductance=2.2µH, Manufacturer="Eaton Cooper", Operating Temperature="-40°C ~ 125°C", Package / Case=Nonstandard, Supplier Part Number 1=704-DR125-2R2-R, Tolerance=±20%, Category="Inductors, Coils, Chokes", ComponentLink1Description=https://www.verical.com/server-webapp/html/getDatasheet?partID=571249&src-supplier=Verical, ComponentLink1URL=https://www.verical.com/server-webapp/html/getDatasheet?partID=571249&src-supplier=Verical, ComponentLink2Description=http://uk.rs-online.com/webdocs/116a/0900766b8116a153.pdf?src-supplier=RSComponents, ComponentLink2URL=http://uk.rs-online.com/webdocs/116a/0900766b8116a153.pdf?src-supplier=RSComponents, ComponentLink3Description=http://www.farnell.com/datasheets/87246.pdf?src-supplier=Element14, ComponentLink3URL=http://www.farnell.com/datasheets/87246.pdf?src-supplier=Element14, Family="Fixed Inductors", Height - Seated (Max)="0.236\" (6.00mm)", Manufacturer Part Number=DR125-2R2-R, Material - Core=Ferrite, Mounting Type="Surface Mount", Packaging="Tape & Reel (TR)", Pricing 1="1=1.98, 10=1.83, 100=1.28, 600=1.11, 1200=0.924, 2400=0.842 (USD)", Q @ Freq=-, Ratings=-, Series=DR, Shielding=Shielded, Size / Dimension="0.492\" L x 0.492\" W (12.50mm x 12.50mm)", Stock 1=606, Supplier 1=Mouser, Type=Wirewound
Q1 Q2: "MOSFET 2N-CH 30V 5.8A 8-SOIC", Current - Continuous Drain (Id) @ 25°C="5.8A, 8.2A", Drain to Source Voltage (Vdss)=30V, Manufacturer="Vishay Siliconix", Package / Case="8-SOIC (0.154\", 3.90mm Width)", Power - Max="1W, 1.25W", Standard Package=1, Supplier Device Package=8-SO, Supplier Part Number 1=781-SI4816BDY-T1-GE3, Category="Discrete Semiconductor Products", ComponentLink1Description=http://www.farnell.com/datasheets/1911984.pdf?src-supplier=Element14, ComponentLink1URL=http://www.farnell.com/datasheets/1911984.pdf?src-supplier=Element14, ComponentLink2Description=http://www.farnell.com/datasheets/2049212.pdf?src-supplier=Element14, ComponentLink2URL=http://www.farnell.com/datasheets/2049212.pdf?src-supplier=Element14, ComponentLink3Description=http://www.vishay.com/docs/73026/si4816bd.pdf?src-supplier=Future+Electronics, ComponentLink3URL=http://www.vishay.com/docs/73026/si4816bd.pdf?src-supplier=Future+Electronics, ComponentLink4Description=http://www.vishay.com/docs/73026/si4816bd.pdf?src-supplier=Digi-Key, ComponentLink4URL=http://www.vishay.com/docs/73026/si4816bd.pdf?src-supplier=Digi-Key, ComponentLink5Description=http://www.vishay.com/docs/73026/si4816bd.pdf?src-supplier=Avnet, ComponentLink5URL=http://www.vishay.com/docs/73026/si4816bd.pdf?src-supplier=Avnet, ComponentLink6Description=http://datasheet.iiic.cc/vishay_[siliconix]/SI4816BDY-T1-GE3.pdf?src-supplier=IIIC, ComponentLink6URL=http://datasheet.iiic.cc/vishay_[siliconix]/SI4816BDY-T1-GE3.pdf?src-supplier=IIIC, Family="FETs - Arrays", FET Feature="Logic Level Gate", FET Type="2 N-Channel (Half Bridge)", Gate Charge (Qg) @ Vgs="10nC @ 5V", Manufacturer Part Number=SI4816BDY-T1-GE3, Mounting Type="Surface Mount", Online Catalog="N-Channel Logic Level Gate FETs", Other Names=SI4816BDY-T1-GE3DKR, Packaging=Digi-Reel®, Pricing 1="1=1.61, 10=1.4, 100=1.1, 500=0.955, 1000=0.791, 2500=0.715 (USD)", Rds On (Max) @ Id, Vgs="18.5 mOhm @ 6.8A, 10V", Series="LITTLE FOOT®", Stock 1=4312, Supplier 1=Mouser, Vgs(th) (Max) @ Id="3V @ 250µA"
R1 R2 R10 R16: library part CRCW08050000Z0EAC, "RES SMD 0 OHM JUMP 1/8W 0805", Manufacturer=Vishay, Supplier Part Number 1=71-CRCW08050000Z0EAC, ComponentLink1Description=http://www.vishay.com/docs/28773/crcwce3.pdf?src-supplier=Digi-Key, ComponentLink1URL=http://www.vishay.com/docs/28773/crcwce3.pdf?src-supplier=Digi-Key, Manufacturer Part Number=CRCW08050000Z0EAC, Pricing 1="1=0.1, 10=0.039, 100=0.015, 1000=0.006, 5000=0.004, 10000=0.004, 25000=0.003 (USD)", Stock 1=191061, Supplier 1=Mouser
R3: library part CRCW080510R0FKEAC, "RES SMD 10 OHM 1% 1/8W 0805", Manufacturer=Vishay, Supplier Part Number 1=71-CRCW080510R0FKEAC, ComponentLink1Description=http://www.vishay.com/docs/20035/dcrcwe3.pdf?src-supplier=Avnet, ComponentLink1URL=http://www.vishay.com/docs/20035/dcrcwe3.pdf?src-supplier=Avnet, ComponentLink2Description=http://www.vishay.com/docs/28773/crcwce3.pdf?src-supplier=Digi-Key, ComponentLink2URL=http://www.vishay.com/docs/28773/crcwce3.pdf?src-supplier=Digi-Key, Manufacturer Part Number=CRCW080510R0FKEAC, Pricing 1="1=0.1, 10=0.059, 100=0.024, 1000=0.01, 5000=0.007, 10000=0.006, 25000=0.005 (USD)", Stock 1=155502, Supplier 1=Mouser
R4 R5: library part ERJ-6BQF1R0V, "Res Thick Film 0805 1 Ohm 1% 1/3W ±200ppm/°C Molded SMD SMD Punched Carrier T/R", Case Code - in=0805, Case Code - mm=2012, Case Height="0.6 mm", Case Length="2 mm", Case Width="1.2 mm", Manufacturer=Panasonic, Operating Temperature Range="- 55 C to + 125 C", Package / Case="0805 (2012 metric)", Power Rating="250 mW (1/4 W)", Resistance="1 Ohms", Supplier Part Number 1=667-ERJ-6BQF1R0V, Temperature Coefficient="200 PPM / C", Tolerance="1 %", Brand=Panasonic, ComponentLink1Description=http://uk.rs-online.com/webdocs/13b8/0900766b813b869e.pdf?src-supplier=RSComponents, ComponentLink1URL=http://uk.rs-online.com/webdocs/13b8/0900766b813b869e.pdf?src-supplier=RSComponents, ComponentLink2Description=http://industrial.panasonic.com/www-data/pdf/AOA0000/AOA0000CE3.pdf?src-supplier=Avnet+Europe, ComponentLink2URL=http://industrial.panasonic.com/www-data/pdf/AOA0000/AOA0000CE3.pdf?src-supplier=Avnet+Europe, ComponentLink3Description=https://www.distrelec.biz/Web/Downloads/_t/ds/ERJ_eng_tds.pdf?mime=application%2Fpdf&src-supplier=Distrelec, ComponentLink3URL=https://www.distrelec.biz/Web/Downloads/_t/ds/ERJ_eng_tds.pdf?mime=application%2Fpdf&src-supplier=Distrelec, ComponentLink4Description=http://www.farnell.com/datasheets/2244535.pdf?src-supplier=Farnell, ComponentLink4URL=http://www.farnell.com/datasheets/2244535.pdf?src-supplier=Farnell, ComponentLink5Description=http://industrial.panasonic.com/www-data/pdf/AOA0000/AOA0000CE3.pdf?src-supplier=Avnet, ComponentLink5URL=http://industrial.panasonic.com/www-data/pdf/AOA0000/AOA0000CE3.pdf?src-supplier=Avnet, Factory Pack Quantity=5000, Manufacturer Part Number=ERJ-6BQF1R0V, Packaging=Reel, Pricing 1="1=0.47, 10=0.334, 100=0.133, 500=0.112, 1000=0.061, 5000=0.05 (USD)", Product="Thick Film Resistors SMD", Product Category="Current Sense Resistors", RoHS=Details, Series=ERJ-6BQ, Stock 1=17387, Supplier 1=Mouser, Termination Style=SMD/SMT, Type="Thick Film Resistors, Low Resistance Type"
R6 R7 R11 R12: library part ERJ-S06F2003V, "Res Thick Film 0805 200K Ohm 1% 0.125W(1/8W) ±100ppm/C Sulfur Resistant Molded SMD Automotive Punched T/R", Manufacturer=Panasonic, Package / Case="0805 (2012 Metric)", Power (Watts)="0.125W, 1/8W", Standard Package=5,000, Supplier Device Package=0805, Supplier Part Number 1=667-ERJ-S06F2003V, Temperature Coefficient=±100ppm/°C, Tolerance=±1%, Category=Resistors, ComponentLink1Description=http://www.mouser.com/ds/2/315/AOA0000CE5-49157.pdf?src-supplier=Mouser, ComponentLink1URL=http://www.mouser.com/ds/2/315/AOA0000CE5-49157.pdf?src-supplier=Mouser, ComponentLink2Description=http://www.industrial.panasonic.com/www-data/pdf/AOA0000/AOA0000CE5.pdf?src-supplier=Avnet, ComponentLink2URL=http://www.industrial.panasonic.com/www-data/pdf/AOA0000/AOA0000CE5.pdf?src-supplier=Avnet, Composition="Thick Film", Family="Chip Resistor - Surface Mount", Features=Anti-Sulfur, Height="0.028\" (0.70mm)", Manufacturer Part Number=ERJ-S06F2003V, Number of Terminations=2, Other Names=ERJS06F2003V, Packaging="Tape & Reel (TR)", Pricing 1="1=0.38, 10=0.15, 100=0.064, 1000=0.046, 5000=0.024, 10000=0.024 (USD)", Product Training Modules="Automotive Resistor Products", Resistance (Ohms)=200K, Series=ERJ, Size / Dimension="0.079\" L x 0.049\" W (2.00mm x 1.25mm)", Stock 1=5699, Supplier 1=Mouser
R8 R14: library part CRCW080510K0FKEAC, "RES SMD 10K OHM 1% 1/8W 0805", Manufacturer=Vishay, Supplier Part Number 1=71-CRCW080510K0FKEAC, ComponentLink1Description=http://www.vishay.com/docs/28773/crcwce3.pdf?src-supplier=Digi-Key, ComponentLink1URL=http://www.vishay.com/docs/28773/crcwce3.pdf?src-supplier=Digi-Key, Manufacturer Part Number=CRCW080510K0FKEAC, Pricing 1="1=0.1, 10=0.059, 100=0.024, 1000=0.01, 5000=0.007, 10000=0.006, 25000=0.005 (USD)", Stock 1=334869, Supplier 1=Mouser
R9 R13 R15 R17 R18: library part RES
U1: "IC MAIN PWR CTRLR QUAD 32-QFN", Base Part Number=ISL6236, Manufacturer=Renesas, Operating Temperature="-40°C ~ 100°C", Package / Case="32-VFQFN Exposed Pad", Supplier Device Package="32-QFN (5x5)", Supplier Part Number 1=968-ISL6236AIRZ, Voltage - Input="4.5 V ~ 25 V", Voltage - Output=Multiple, Applications="Controller, Notebook Power System", Categories="Integrated Circuits (ICs)", Manufacturer Part Number=ISL6236AIRZ, Mounting Type="Surface Mount", Number of Outputs=4, Packaging=Tube, Part Status=Active, Pricing 1="1=6.09, 10=5.18, 100=4.49, 250=4.26, 500=3.82, 1000=3.22 (USD)", Series=-, Stock 1=0, Supplier 1=Mouser

## Via types
v1: diameter 0.45, hole 0.2, L1 to L6, 69 vias

## Nets (pads, with @x,y where several pads share a name; then routed paths per layer and width w, separated by ;. In a path a pad name is that pad's centre, name@x,y a point inside that pad or via, vN(x,y) a via of type N, cw(c..) or ccw(c..) an arc to the next point about the centre after c; other vN are vias at no path point)
+1V05: C9.1 J4.1 L2.2 U1.30 | length 16.3
  L3 w0.5: v1(25.75,28.05) 26.8,29.1 27.6,29.1
  L3 w1: 27.6,29.1 31.4,29.1 35.3,33 v1(35.3,37)
  L6 w0.2: U1.30 v1(25.75,28.05)
+1V5: C10.1 J3.1 L1.1 R9.2 U1.10 | length 14.8
  L3 w1: v1(30,18.9) 35.4,13.5 v1(35.4,13)
  L6 w0.2: U1.10 26.25,21.55 26.6,21.2
  L6 w0.5: 26.6,21.2 27.1,20.7 29.5,20.7 30,20.2 R9.2 v1(30,18.9)
+5V_LDO: C1.2 R1.2 U1.7 | length 24.1
  L3 w0.5: v1(13.6,22.2) 13.6,22.8 15.7,24.9 19.8,24.9 21.4,23.3 29.6,23.3 v1(29.85,23.05)
  L6 w0.2: U1.7 27.85,23.75 28.3,23.3
  L6 w0.5: v1(13.6,22.2) R1.2 ; 28.3,23.3 28.6,23 28.6,22.2 28.9,21.9 C1.2 v1(29.85,23.05)
+5V_PVCC: C3.2 R1.1 R2.2 R3.1 U1.19 | length 12.2
  L6 w0.2: C3.2 20.928,24.6 21.278,24.25 U1.19
  L6 w0.5: R1.1 16.25,25.7 ; R3.1 16.25,25.7 ; C3.2 20.35,25.55 20.2,25.7 16.25,25.7
+5V_VCC: C4.2 R3.2 R8.2 R10.2 R11.2 R12.1 R14.2 R17.2 U1.2 U1.3 U1.20 | length 15.8
  L6 w0.15: v1(21.45,24.75) U1.20
  L6 w0.2: U1.3 28.05,25.75 28.7,26.4 28.7,27.8 ; U1.2 27.85,26.25 v1(28.1,26.5)
  L6 w0.3: R12.1@14.15,29.4 14.25,29.3 R12.1 ; R11.2@14.25,31.9 R11.2 ; R17.2 v1(28.3,35.3) ; R8.2 v1(29.75,36.25)
  L6 w0.5: v1(13.2,29.4) R12.1@14.15,29.4 ; v1(13.3,26.9) R3.2 ; v1(13.3,31.8) 14.15,31.8 R11.2@14.25,31.9 ; v1(22.8,17.1) R14.2 ; v1(27.5,17.1) R10.2 ; 28.7,27.8 28.7,28.5 29.85,29.65 C4.2 v1(29.85,31.35)
+REF: C12.1 R15.2 U1.1 | length 9.8
  L6 w0.2: U1.1 27.4,27.1 27.7,27.4 27.7,28
  L6 w0.5: R15.2 27.55,32.8 C12.1 29.85,32.35 29.1,31.6 28.6,31.6 27.7,30.7 27.7,28
+VIN: C2.2 C5.2 C6.2 J1.1 Q1.8 Q2.8 R2.1 U1.6 | length 5.5
  L6 w0.2: U1.6 29.6,24.25 C2.2 C2.2@29.85,25.15
  L6 w0.3: C2.2@29.85,25.15 30.3,25.6 v1(31,25.6)
  L6 w0.5: v1(13.4,24.6) R2.1
+VREF3: C11.1 R16.2 U1.5 | length 22.5
  L6 w0.2: U1.5 28.45,24.75 28.7,25
  L6 w0.3: 28.7,25 29.85,26.15 C11.1
  L6 w0.5: R16.2 31.3,37.7 33.7,35.3 33.7,29.5 32.8,28.6 30.2,28.6 29.85,28.25 C11.1
EN1: R14.1 U1.14 | length 4
  L6 w0.15: R14.1 23.75,19.75 24.25,20.25 U1.14
EN_LDO: R8.1 U1.4 | length 14.9
  L6 w0.15: U1.4 28.126,25.25 29.175,26.299 29.175,28.275 30.1,29.2 32.6,29.2 33.2,29.8 33.2,33.65 R8.1
FB1: R9.1 R10.1 R13.2 U1.11 | length 11.1
  L6 w0.2: U1.11 25.75,20.65 26.65,19.75 R10.1 28.35,19.75 28.7,19.4 28.7,18.1 28.95,17.85 R9.1 ; R9.1@29.45,17.8 R13.2@32.4,17.8
GND: C1.1 C2.1 C3.1 C4.1 C5.1 C6.1 C9.2 C10.2 C11.2 C12.2 J2.1 J5.1 J6.1 Q1.2 Q1.3 Q2.2 Q2.3 R6.2 R7.1 R13.1 R18.1 U1.8 U1.21 U1.22 U1.29 U1.33 | length 17.9
  L6 w0.2: U1.21 U1.33@24.75,25.25 ; U1.22 24.25,25.75 U1.33@24.75,25.25 ; U1.29 25.25,25.25 U1.33 U1.33@24.75,25.25 ; v1(27.4,22.5) U1.8
  L6 w0.5: v1(18.45,23.35) C3.1 ; v1(24.8,30.85) R6.2 ; v1(25.2,17.1) R7.1 ; R18.1 v1(28.2,40.1) ; C2.1 v1(32.7,24.5) ; C11.2 v1(32.7,26.9) ; C4.1 v1(31.75,31.35) ; C12.2 v1(32.7,32.8) ; R13.1 v1(33.6,19.75) ; C1.1 v1(33.9,21.9)
  other v1: 12.8,14.4 12.8,15.6 35.8,18.5 39.4,18.5 13.6,19.3 35.8,19.7 39.4,19.7 13.6,20 13.6,20.7 35.8,20.9 39.4,20.9 24.1,24 26,24 24.1,26 26,26 35.8,29.1 39.4,29.1 35.8,30.3 39.4,30.3 35.8,31.5 39.4,31.5 12.8,38.3 12.8,39.5 18.8,43.1 18.8,43.8 18.8,44.5
LGATE1: Q1.4 U1.18 | length 21.2
  L1 w0.5: v1(12.305,13.095) Q1.4
  L3 w1: v1(12.305,13.095) 10.6,14.8 10.6,17.8 11.2,18.4 15,18.4 17.1,20.5 v1(19.7,23.1)
  L6 w0.2: v1(19.7,23.1) 20.304,23.1 20.954,23.75 U1.18
LGATE2: Q2.4 U1.23 | length 17.8
  L1 w0.5: v1(12.305,36.995) Q2.4
  L3 w1: v1(12.305,36.995) 12.305,34.095 12.342,34.095 20.187,26.25 v1(21.85,26.25)
  L6 w0.2: v1(21.85,26.25) U1.23
NetC7_1: C7.1 R4.1 | length 2.4
  L6 w0.2: C7.1@18.55,19.75 R4.1
NetC8_2: C8.2 R5.2 | length 2.4
  L6 w0.15: R5.2@18.45,27 R5.2
  L6 w0.2: R5.2@18.45,27 C8.2
NetR4_2: R4.2 U1.17 | length 2.6
  L6 w0.2: R4.2 20.9,22.2 21.95,23.25 U1.17
NetR5_1: R5.1 U1.24 | length 2.2
  L6 w0.2: R5.1 20.6,26.75 U1.24
NetR6_1: R6.1 U1.31 | length 1.7
  L6 w0.2: R6.1 25.9,28.572 26.25,28.222 U1.31
NetR7_2: R7.2 U1.12 | length 2.9
  L6 w0.2: R7.2 25.25,19.8 U1.12
PHASE1: C7.2 L1.2 Q1.5 Q1.6 Q1.7 U1.16 | length 12.8
  L1 w0.3: 19.59,15.635 19.725,15.5 v1(19.825,15.5) 19.825,15.4 L1.2
  L3 w1: v1(19.825,15.5) 19.825,17.675 v1(20.35,18.2)
  L6 w0.2: 22.8,21.4 23.25,21.85 U1.16
  L6 w0.4: v1(20.35,18.2) C7.2 21.2,19.8 22.8,21.4
PHASE2: C8.1 L2.1 Q2.5 Q2.6 Q2.7 U1.25 | length 11.9
  L1 w0.3: L2.1@22.22,36.995 L2.1
  L3 w1: v1(19.8,36.995) 20.35,36.445 v1(20.35,30.45)
  L6 w0.2: 22.4,28.7 23.25,27.85 U1.25
  L6 w0.4: v1(20.35,30.45) C8.1 21.8,29.3 22.4,28.7
POK1: R12.2 U1.13 U1.27 | length 39.3
  L3 w0.15: v1(18.4,31.1) 18.4,29.9 20.75,27.55 28.05,27.55 31,24.6 31,21.6 29.3,19.9 26.4,19.9 v1(24.75,21.55)
  L6 w0.15: v1(24.75,21.55) U1.13
  L6 w0.2: R12.2 16.25,30.35 17,31.1 v1(18.4,31.1) 21.9,31.1 24.25,28.75 U1.27
POK2: R11.1 U1.28 | length 11.1
  L6 w0.2: R11.1 21.7,31.8 24.75,28.75 U1.28
REFIN2: R15.1 R16.1 R17.1 R18.2 U1.32 | length 13.4
  L6 w0.2: U1.32 26.75,28.35 27,28.6 27,29.275
  L6 w0.4: R18.2 R16.1 R17.1 R15.1 27,31.45 27,29.275
UGATE1: Q1.1 U1.15 | length 15.9
  L1 w0.5: v1(12.305,16.905) Q1.1
  L3 w1: v1(12.305,16.905) 17.005,16.905 21.45,21.35 v1(23.75,21.35)
  L6 w0.2: v1(23.75,21.35) U1.15
UGATE2: Q2.1 U1.26 | length 22.8
  L1 w0.5: v1(12.305,40.805) Q2.1
  L3 w1: v1(12.305,40.805) 17.995,40.805 23.5,35.3 v1(23.5,28.6)
  L6 w0.2: v1(23.5,28.6) 23.75,28.35 U1.26
pads on no net: U1.9

## Polygon pours and split planes (outlines as drawn)
GND on L1 "L1-No Net" (solid, pour order 24): 12.4,16 14.3,16 14.3,14 12.4,14
GND on L1 "L1-No Net" (solid, pour order 22): 12.4,39.9 14.3,39.9 14.3,37.9 12.4,37.9
GND on L1 "L1-No Net" (solid, pour order 16): 35.4,21.7 39.8,21.7 39.8,17.8 35.4,17.8
GND on L1 "L1-No Net" (solid, pour order 20): 17.2,45.1 19.5,45.1 19.5,42.5 17.2,42.5
GND on L1 "L1-No Net" (solid, pour order 18): 15.2,18.7 12.9,18.7 12.9,21.3 15.2,21.3
GND on L1 "L1-No Net" (solid, pour order 14): 35.4,32.2 39.8,32.2 39.8,28.3 35.4,28.3
+VIN on L1 "L1-No Net" (solid, pour order 12): 1.6,25.4 9.5,25.4 11.8,23.1 16.5,23.1 16.5,16.6 19.4,16.6 19.4,22.8 18.1,22.8 18.1,25 31.5,25 31.5,26 29.8,26 29.8,25.7 12.8,25.7 10.9,27.6 10.9,42 15.3,42 15.3,40.5 19.4,40.5 19.4,41.3 16.7,41.3 16.7,45.1 1.6,45.1
+1V5 on L1 "L1-No Net" (solid, pour order 8): 30.1,16.5 39.2,16.5 39.2,12.1 47.1,12.1 47.1,3 30.1,3
+1V05 on L1 "L1-No Net" (solid, pour order 10): 30.2,33.4 39.3,33.4 39.3,36.9 47.1,36.9 47.1,46 30.2,46
PHASE2 on L1 "L3-No Net" (solid, pour order 2): 17.9,40.1 24.3,40.1 24.3,34 20.2,34 17.9,36.3
PHASE1 on L1 "L3-No Net" (solid, pour order 6): 18.1,16 24.2,16 24.2,10.1 20,10.1 18.1,12
+5V_VCC on L4 "L1-No Net" (solid, pour order 26): 11.5,37.7 36.7,37.7 36.7,15.4 11.5,15.4
GND on L2 (split plane): 49.49,0.51 0.51,0.51 0.51,49.49 49.49,49.49
GND on L5 (split plane): 49.49,0.51 0.51,0.51 0.51,49.49 49.49,49.49

## Silkscreen, mask and mechanical layers (free items; w line width, h text height)
Top Overlay:
  text "OUT2" at 42.2,41.4 h1.52
  text "+VIN" at 2.2,31.4 h1.52
  text "GND" at 43,28 h1.52
  text "GND" at 43,19.5 h1.52
  text "GND" at 3,17 h1.52
  text "OUT1" at 42.5,6 h1.52
Bottom Overlay:
  text "ISL6236A DEMO V01" at 33.8,1.3 h2
Board Outline:
  lines w0.2: 0,0 0,50 ; 0,0 0,50 ; 0,0 50,0 ; 0,0 50,0 ; 0,50 50,50 ; 0,50 50,50 ; 50,0 50,50
Mechanical Drawing:
  lines w0.2: 58.4,-14.1 78.4,-14.1 78.4,-4.3 76.5,-2.4 58.4,-2.4 58.4,-14.1
  lines w1: 0,0 0,50 ; 0,0 0,50 ; 0,0 50,0 ; 0,0 50,0 ; 0,50 50,50 ; 0,50 50,50 ; 50,0 50,50
  text "Mechanical Drawing ISL6236A Demo" at -4.2,65.8 h2
  text "Units: mm" at 59.8,-6.2 h2
  text "Scale: 1:1" at 59.4,-11.6 h2
ASM Top:
  text "Assembly Top" at 12.25,61.5 h2
ASM Bottom:
  text "Assembly Bottom" at 10,57.75 h2

## Dimensions
-0.7,0 to -0.7,50 on Mechanical Drawing
0,-0.7 to 50,-0.7 on Mechanical Drawing